# Altium PCB nahhui idioot.PcbDoc
Units mil, origin at the board's own origin, x right, y up, seen from the top; angles counter-clockwise.
Board outline 3395 x 2505 mil, 4 copper layers (Top Layer, GND top, GND bottom, Bottom Layer), stack 23.756 mil thick; 99 components, 80 nets, 373 pads, 151 vias.
Unrouted connection lines stored in the file: 3.
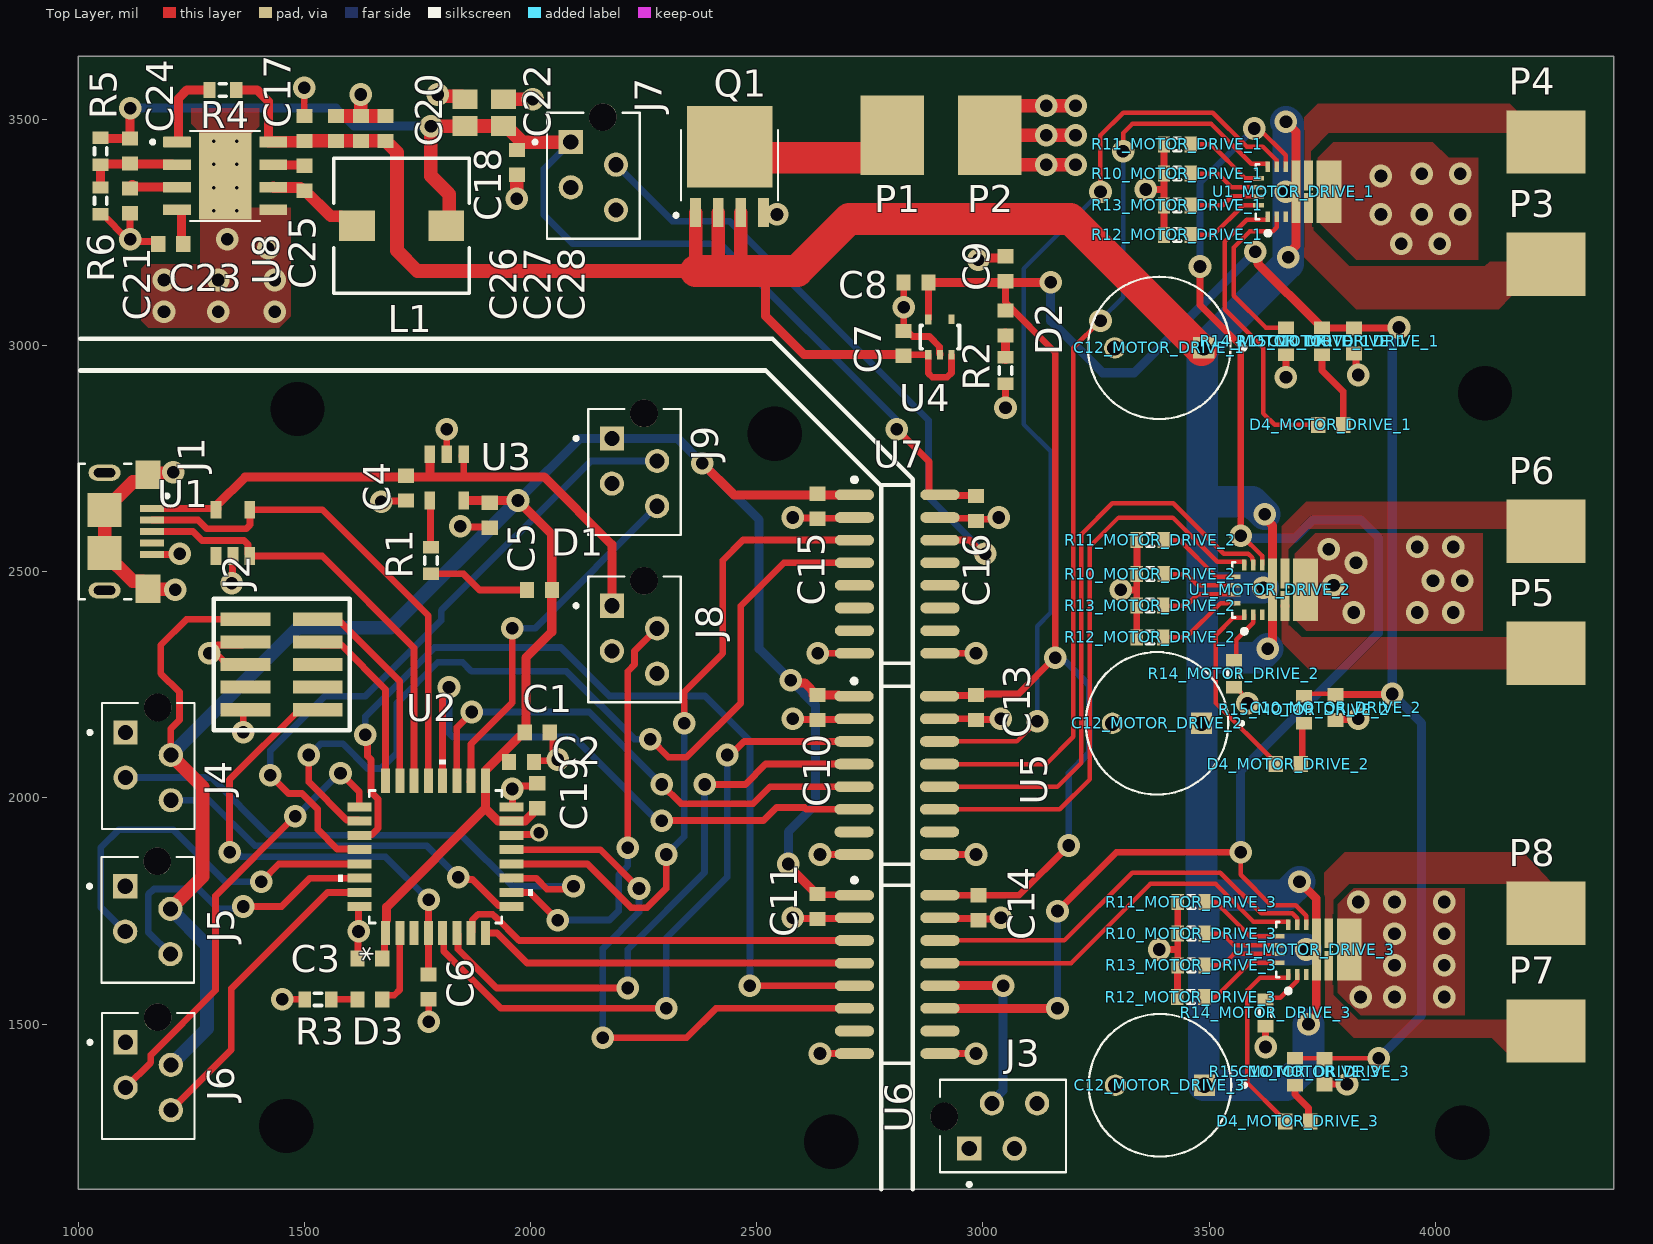
[diagram p0: Top Layer view]
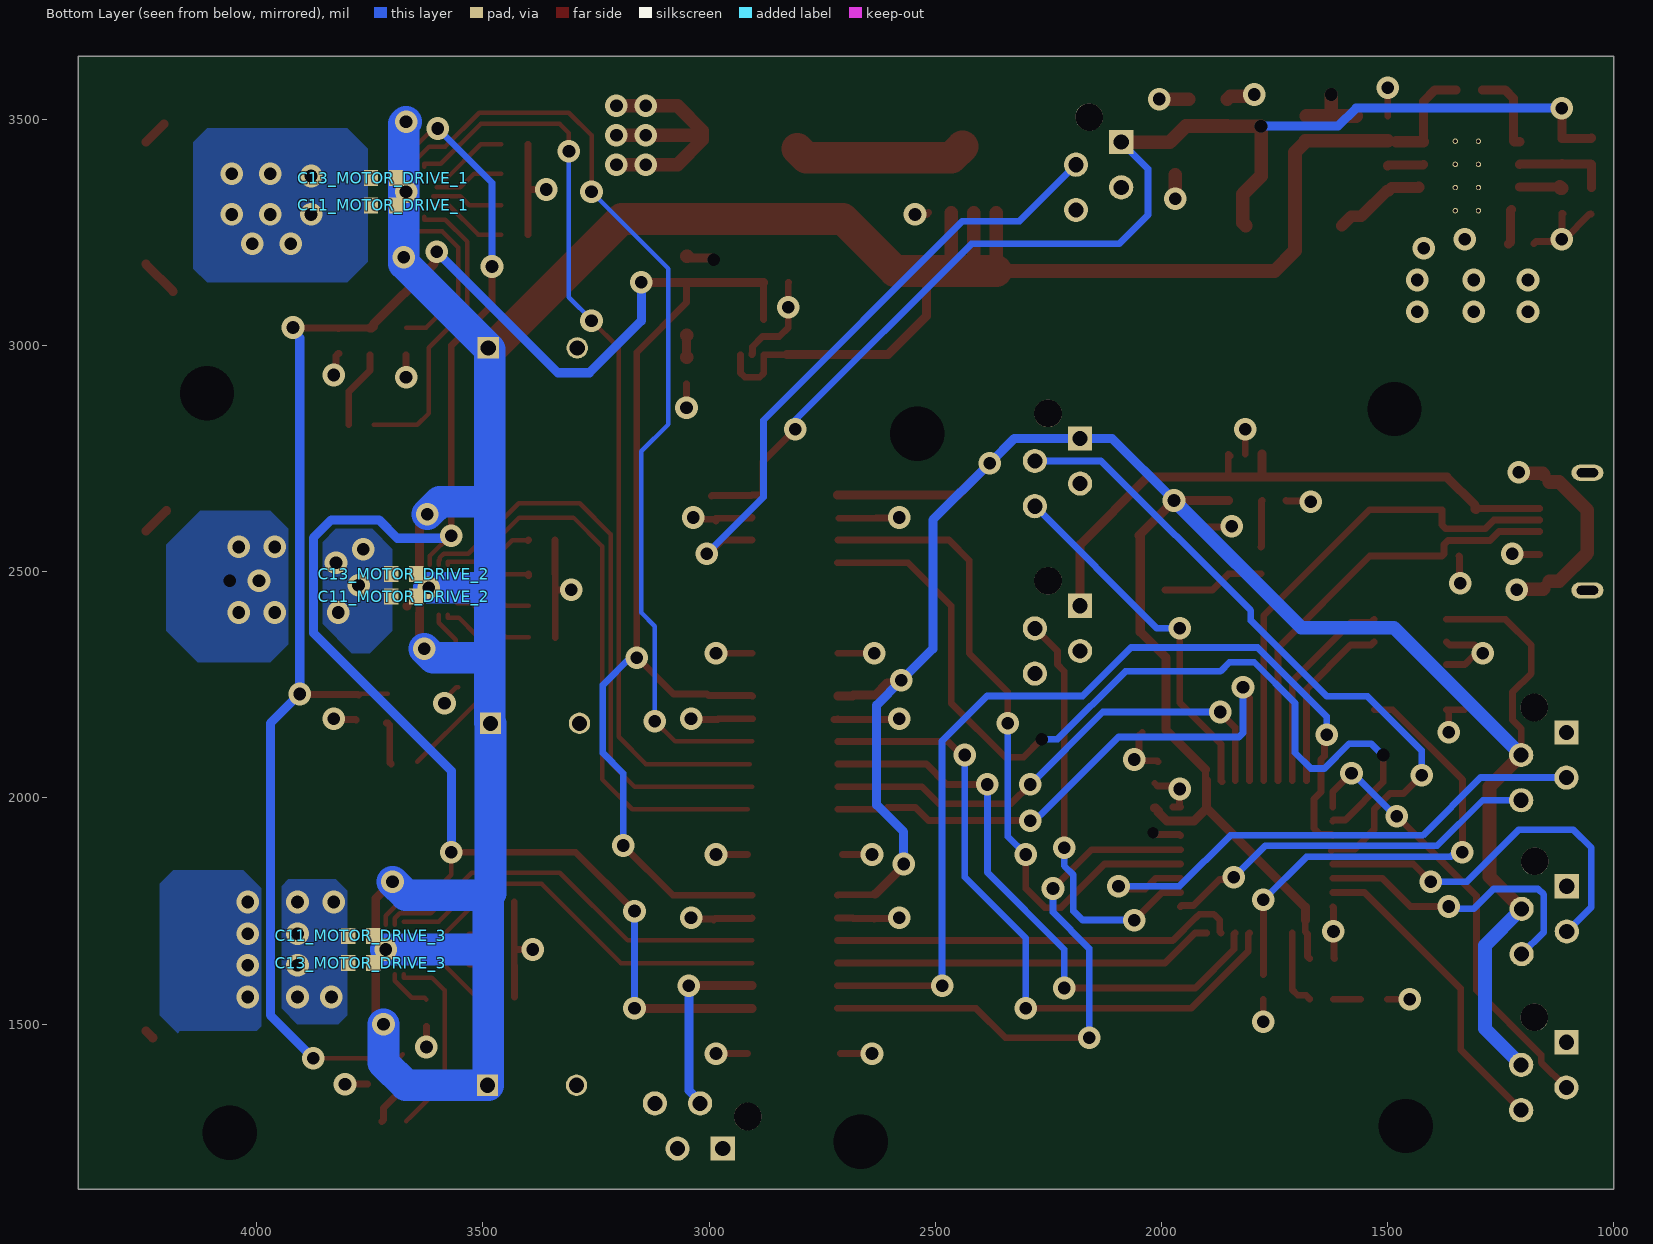
[diagram p1: Bottom Layer view, seen from below]
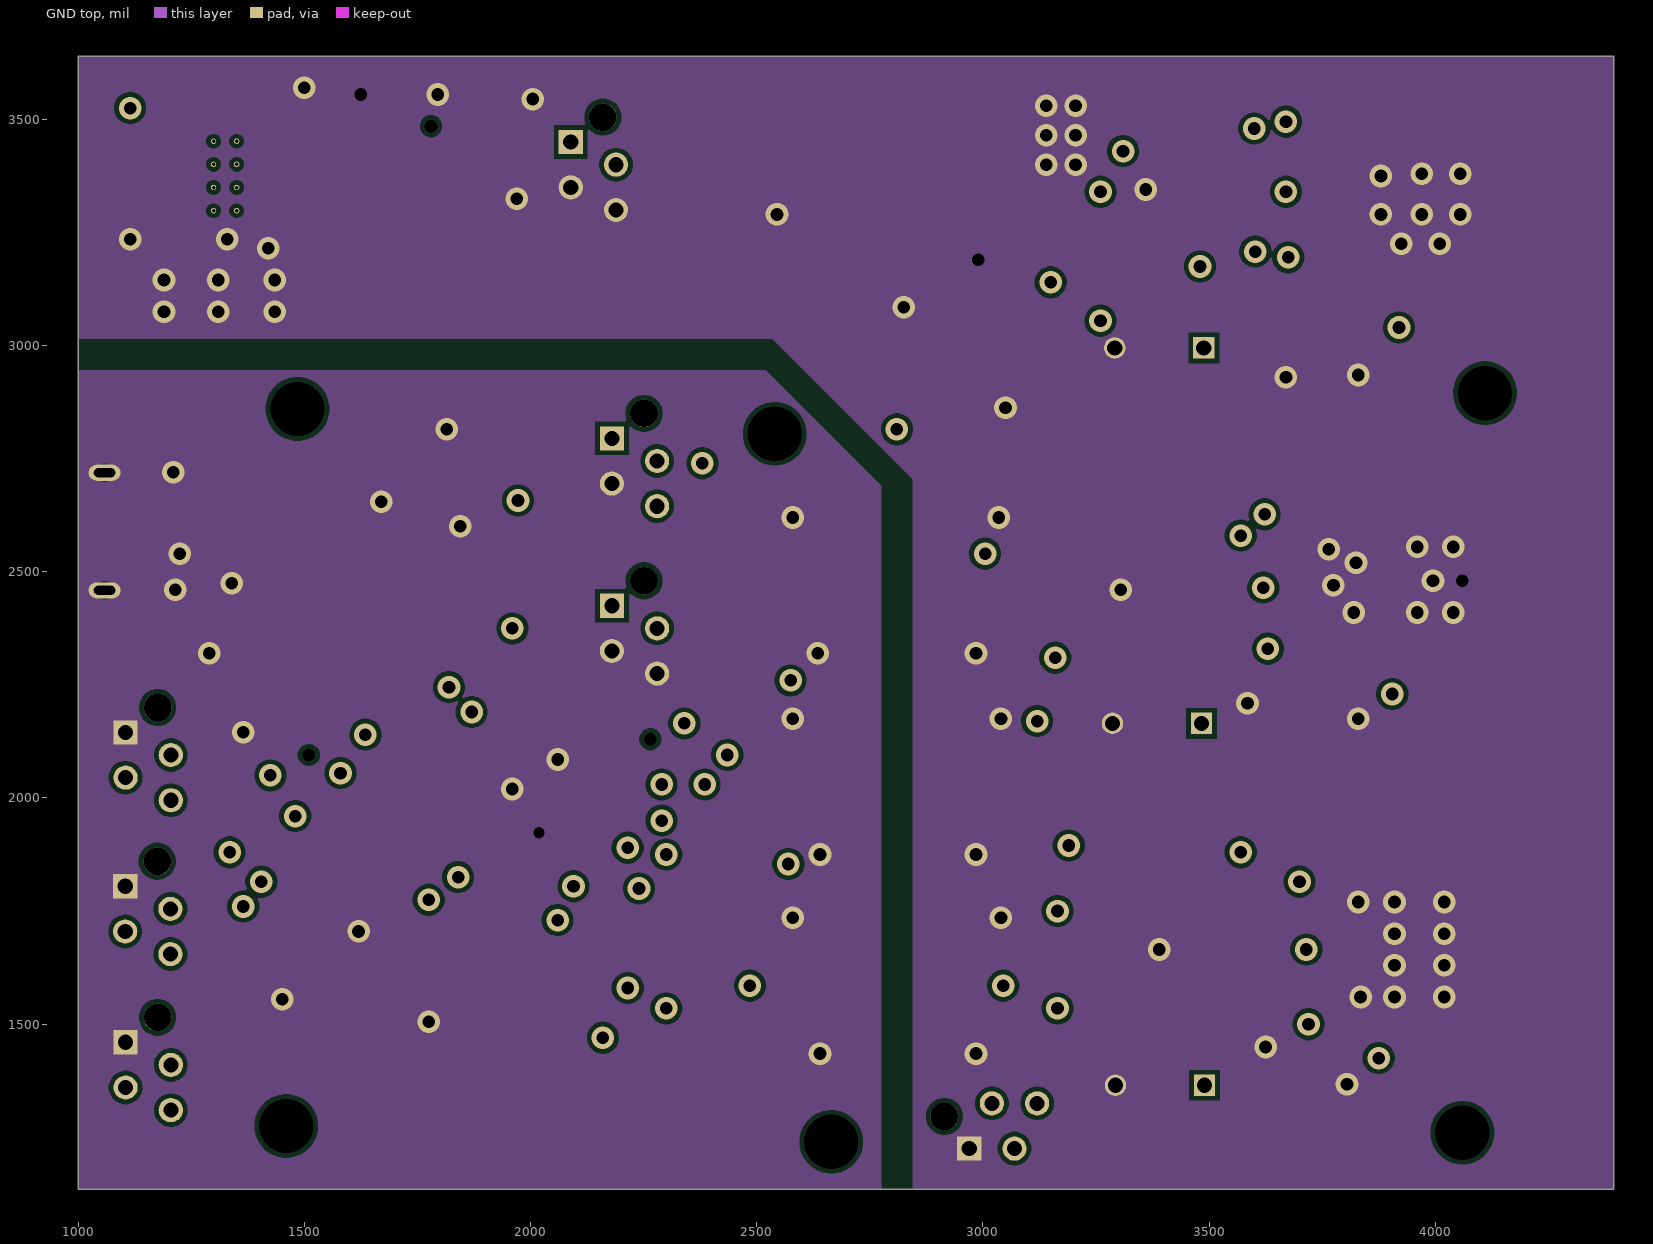
[diagram p2: GND top]
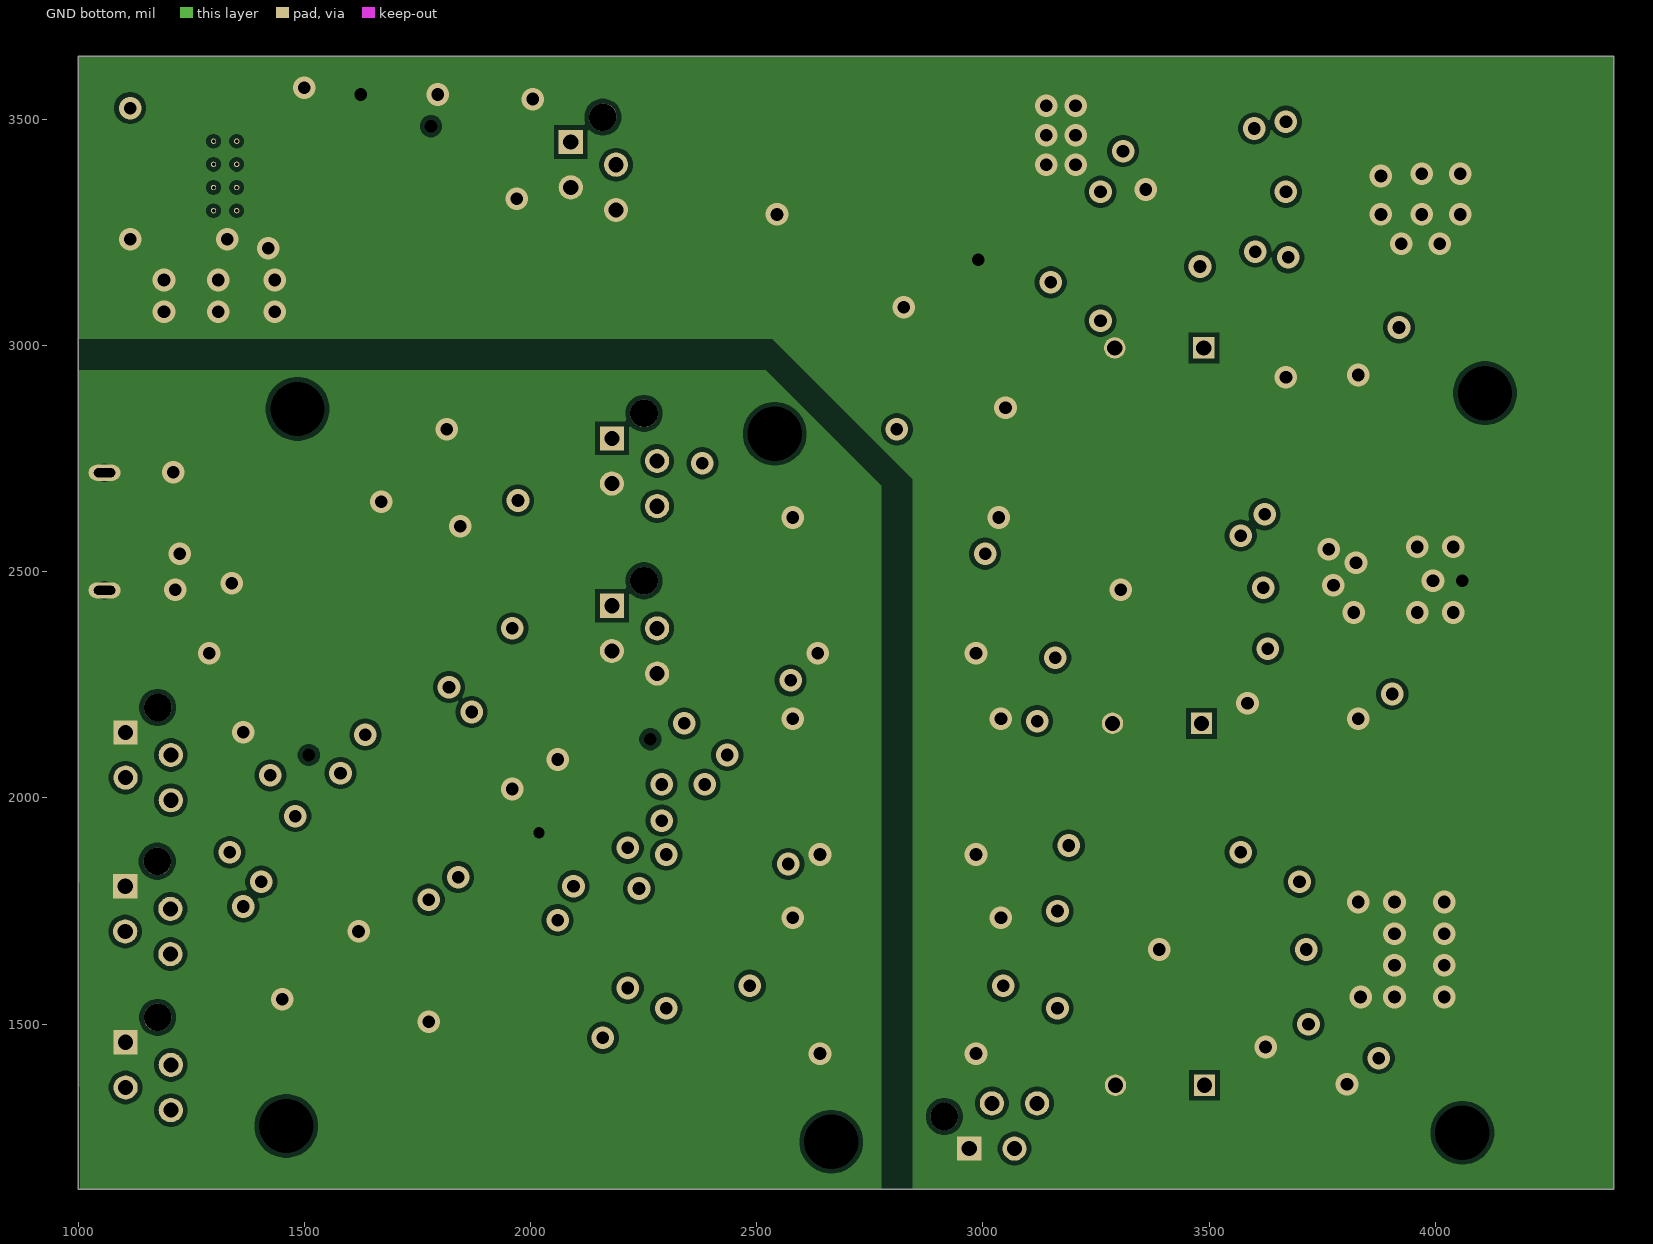
[diagram p3: GND bottom]

## Layer stack, top to bottom
Top Solder: solder mask 0.4, Solder Resist, Dk 3.5
Top Layer: signal copper 1.378
Dielectric 2: prepreg 2.8, PP-006, Dk 4.1
GND top: signal copper 1.4
Dielectric 1: dielectric 12.6, FR-4, Dk 4.8
GND bottom: signal copper 1.4
Dielectric 3: prepreg 2.8, PP-006, Dk 4.1
Bottom Layer: signal copper 1.378
Bottom Solder: solder mask 0.4, Solder Resist, Dk 3.5

## Board outline
1000,1135 1000,3640 4395,3640 4395,1135

## Design rules (kind name [scope] priority, off if disabled: settings)
Clearance [All] p1: gap=10 ignorepadtopadclearanceinfootprint=TRUE except(0: Arc-Hole Track-Hole SMDPad-Hole THPad-Hole Via-Hole Fill-Hole Poly-Hole Region-Hole Text-Hole; 7: Arc-SMDPad Track-SMDPad; 8: Arc-Arc Arc-Track Track-Track)
PolygonConnect [All] p1: connectstyle=Direct reliefconductorwidth=10 reliefentries=4 polygonreliefangle="90 Angle" airgapwidth=10
RoutingVias [All] p1: holewidth=28 width=50 viastyle="Through Hole" minholewidth=28 minwidth=50 maxholewidth=28 maxwidth=50
SolderMaskExpansion SolderMaskExpansionVia [IsVia] p1: expansion=4 istentingtop=TRUE
SolderMaskExpansion [All] p2: expansion=4 istentingtop=FALSE
Width [All] p1: maxlimit=70 minlimit=10 preferedwidth=15 midlayer1_maxwidth=10 midlayer1_prefwidth=10 midlayer2_maxwidth=10 midlayer2_prefwidth=10 minimp=50.000000 maximp=50.000000 favimp=50.000000
30 further rules are at their usual default settings.

## Classes and differential pairs
channel class motor_DRV: MOTOR_DRIVE_1 MOTOR_DRIVE_2 MOTOR_DRIVE_3
component class motor_MCU: C1 C2 C3 C4 C5 C6 C7 C8 C9 C10 C11 C13 C14 C15 C16 C17 C19 C20 C21 C23 C24 C25 C26 C27 C28 D1 D2 D3 J1 J2 J3 J4 J5 J6 J7 J8 J9 L1 P1 P2 P3 P4 P5 P6 P7 P8 Q1 R1 R2 R3 R4 R5 R6 U1 U2 U3 U4 U5 U6 U7 U8
component class MOTOR_DRIVE_3: C10_MOTOR_DRIVE_3 C11_MOTOR_DRIVE_3 C12_MOTOR_DRIVE_3 C13_MOTOR_DRIVE_3 D4_MOTOR_DRIVE_3 R10_MOTOR_DRIVE_3 R11_MOTOR_DRIVE_3 R12_MOTOR_DRIVE_3 R13_MOTOR_DRIVE_3 R14_MOTOR_DRIVE_3 R15_MOTOR_DRIVE_3 U1_MOTOR_DRIVE_3
component class MOTOR_DRIVE_2: C10_MOTOR_DRIVE_2 C11_MOTOR_DRIVE_2 C12_MOTOR_DRIVE_2 C13_MOTOR_DRIVE_2 D4_MOTOR_DRIVE_2 R10_MOTOR_DRIVE_2 R11_MOTOR_DRIVE_2 R12_MOTOR_DRIVE_2 R13_MOTOR_DRIVE_2 R14_MOTOR_DRIVE_2 R15_MOTOR_DRIVE_2 U1_MOTOR_DRIVE_2
component class MOTOR_DRIVE_1: C10_MOTOR_DRIVE_1 C11_MOTOR_DRIVE_1 C12_MOTOR_DRIVE_1 C13_MOTOR_DRIVE_1 D4_MOTOR_DRIVE_1 R10_MOTOR_DRIVE_1 R11_MOTOR_DRIVE_1 R12_MOTOR_DRIVE_1 R13_MOTOR_DRIVE_1 R14_MOTOR_DRIVE_1 R15_MOTOR_DRIVE_1 U1_MOTOR_DRIVE_1

## Components (designator, comment, footprint, x,y, rotation, side; value= is the part's Value field where it differs from the comment)
C1 "Cap Semi" 1608[0603] 2015,2145 r180 top value=4.7uF
C2 "Cap Semi" 1608[0603] 1980,2080 r180 top value=100nF
C3 "Cap Semi" 1608[0603] 1645,1645 r0 top value=100nF
C4 "Cap Semi" 1608[0603] 1725,2685 r90 top value=4.7uF
C5 "Cap Semi" 1608[0603] 1910,2625 r90 top value=4.7uF
C6 "Cap Semi" 1608[0603] 1775,1582.44 r90 top value=100nF
C7 "Cap Semi" 1608[0603] 2825,3005 r270 top value=4.7uF
C8 "Cap Semi" 1608[0603] 2852.44,3140 r0 top value=4.7uF
C9 "Cap Semi" 1608[0603] 3050,3170 r270 top value=100nF
C10 "Cap Semi" 1608[0603] 2635,2200 r90 top value=100nF
C10_MOTOR_DRIVE_1 "Cap Semi" 1608[0603] 3820,3010 r90 top value=100nF (schematic designator C10)
C10_MOTOR_DRIVE_2 "Cap Semi" 1608[0603] 3780,2200 r90 top value=100nF (schematic designator C10)
C10_MOTOR_DRIVE_3 "Cap Semi" 1608[0603] 3755,1395 r90 top value=100nF (schematic designator C10)
C11 "Cap Semi" 1608[0603] 2635,1760 r90 top value=100nF
C11_MOTOR_DRIVE_1 "Cap Semi" 1608[0603] 3720,3310 r180 bottom value=4.7uf (schematic designator C11)
C11_MOTOR_DRIVE_2 "Cap Semi" 1608[0603] 3675,2445 r180 bottom value=4.7uf (schematic designator C11)
C11_MOTOR_DRIVE_3 "Cap Semi" 1608[0603] 3770,1695 r180 bottom value=4.7uf (schematic designator C11)
C12_MOTOR_DRIVE_1 "470u" CAPPRD500W60D800H1500 3390,2995 r180 top (schematic designator C12)
C12_MOTOR_DRIVE_2 "470u" CAPPRD500W60D800H1500 3385,2165 r180 top (schematic designator C12)
C12_MOTOR_DRIVE_3 "470u" CAPPRD500W60D800H1500 3391.57,1365 r180 top (schematic designator C12)
C13 "Cap Semi" 1608[0603] 2985,2200 r90 top value=100nF
C13_MOTOR_DRIVE_1 "Cap Semi" 1608[0603] 3720,3370 r180 bottom value=100nF (schematic designator C13)
C13_MOTOR_DRIVE_2 "Cap Semi" 1608[0603] 3675,2495 r180 bottom value=100nF (schematic designator C13)
C13_MOTOR_DRIVE_3 "Cap Semi" 1608[0603] 3770,1635 r180 bottom value=100nF (schematic designator C13)
C14 "Cap Semi" 1608[0603] 2990,1757.44 r90 top value=100nF
C15 "Cap Semi" 1608[0603] 2635,2645 r90 top value=100nF
C16 "Cap Semi" 1608[0603] 2985,2640 r90 top value=100nF
C17 "Cap Semi" 1608[0603] 1500,3480 r270 top value=4.7uF
C18 "Cap Semi" 1608[0603] 1970,3405 r90 top value=4.7uF
C19 "Cap Semi" 1608[0603] 2015,2005 r270 top value=100nF
C20 "Cap Pol3" C0805 1855,3515 r90 top value=22uF
C21 "Cap Semi" 1608[0603] 1115,3320 r90 top value=1uF
C22 "Cap Pol3" C0805 1940,3515 r90 top value=22uF
C23 "Cap Semi" 1608[0603] 1205,3225 r180 top value=3.3nF
C24 "Cap Semi" 1608[0603] 1115,3430 r90 top value=12pF
C25 "Cap Semi" 1608[0603] 1500,3370 r90 top value=100nF
C26 "Cap Semi" 1608[0603] 1570,3480 r270 top value=4.7uF
C27 "Cap Semi" 1608[0603] 1625,3480 r270 top value=4.7uF
C28 "Cap Semi" 1608[0603] 1680,3480 r270 top value=4.7uF
D1 "3V3_GOOD" 1608[0603] 2020,2460 r180 top
D2 "M5V_GOOD" 1608[0603] 3050,3050 r270 top
D3 "LED" 1608[0603] 1645,1555 r180 top
D4_MOTOR_DRIVE_1 "LED2" 1608[0603] 3768.9,2825 r180 top (schematic designator D4)
D4_MOTOR_DRIVE_2 "LED2" 1608[0603] 3675,2075 r180 top (schematic designator D4)
D4_MOTOR_DRIVE_3 "LED2" 1608[0603] 3696.1,1285 r180 top (schematic designator D4)
J1 "10118193-0001LF" FCI_10118193-0001LF 1058.54,2589.02 r270 top
J2 "FTSH-105-01-XXX-DV-K" FTSH-105-01-XXX-DV-K 1450,2295 r270 top
J3 "7-215079-4" TE_7-215079-4 2970,1225 r180 top
J4 "7-215079-4" TE_7-215079-4 1105,2145 r90 top
J5 "7-215079-4" TE_7-215079-4 1104.13,1804.88 r90 top
J6 "7-215079-4" TE_7-215079-4 1105,1460 r90 top
J7 "7-215079-4" TE_7-215079-4 2089.13,3449.88 r90 top
J8 "7-215079-4" TE_7-215079-4 2180,2425 r90 top
J9 "7-215079-4" TE_7-215079-4 2180,2795 r90 top
L1 "Inductor" WE-PD-M-PB 1715,3265 r0 top value=4.7uH
P1 "BAT+" PCBComponent_1 2800,3465 r90 top
P2 "BAT-" PCBComponent_1 3015,3465 r90 top
P3 "M1+" PCBComponent_1 4245,3180 r180 top
P4 "M1-" PCBComponent_1 4245,3450 r180 top
P5 "M2+" PCBComponent_1 4245,2320 r180 top
P6 "M2-" PCBComponent_1 4245,2590 r180 top
P7 "M3+" PCBComponent_1 4245,1485 r180 top
P8 "M3-" PCBComponent_1 4245,1745 r180 top
Q1 "BUK6Y10-30P" TO127P600X120-5N 2440,3398.27 r0 top
R1 "Res2" J1-0603 1780,2525 r270 top value=1K
R2 "Res2" J1-0603 3050,2945 r90 top value=13K
R3 "Res2" J1-0603 1530.47,1555 r0 top value=1K
R4 "Res2" J1-0603 1320,3565 r0 top value=10K
R5 "Res2" J1-0603 1050,3429.53 r270 top value=133K
R6 "Res2" J1-0603 1050,3320 r270 top value=24K
R10_MOTOR_DRIVE_1 "Rsr" J1-0603 3430,3380 r180 top value=0 (schematic designator R10)
R10_MOTOR_DRIVE_2 "Rsr" J1-0603 3370,2495 r180 top value=0 (schematic designator R10)
R10_MOTOR_DRIVE_3 "Rsr" J1-0603 3460.47,1700 r180 top value=0 (schematic designator R10)
R11_MOTOR_DRIVE_1 "Rdiag" J1-0603 3430,3445 r180 top value=0 (schematic designator R11)
R11_MOTOR_DRIVE_2 "Rdiag" J1-0603 3370,2570 r180 top value=0 (schematic designator R11)
R11_MOTOR_DRIVE_3 "Rdiag" J1-0603 3460.47,1770 r180 top value=0 (schematic designator R11)
R12_MOTOR_DRIVE_1 "Rmode" J1-0603 3430,3245 r180 top value=0 (schematic designator R12)
R12_MOTOR_DRIVE_2 "Rmode" J1-0603 3369.53,2355 r180 top value=0 (schematic designator R12)
R12_MOTOR_DRIVE_3 "Rmode" J1-0603 3459.53,1560 r180 top value=0 (schematic designator R12)
R13_MOTOR_DRIVE_1 "Rtrip" J1-0603 3430,3310 r180 top value=0 (schematic designator R13)
R13_MOTOR_DRIVE_2 "Rtrip" J1-0603 3369.53,2425 r180 top value=0 (schematic designator R13)
R13_MOTOR_DRIVE_3 "Rtrip" J1-0603 3460.47,1630 r180 top value=0 (schematic designator R13)
R14_MOTOR_DRIVE_1 "R|PROP|" J1-0603 3670,3009.53 r270 top value=2K2 (schematic designator R14)
R14_MOTOR_DRIVE_2 "R|PROP|" J1-0603 3555,2274.53 r270 top value=2K2 (schematic designator R14)
R14_MOTOR_DRIVE_3 "R|PROP|" J1-0603 3625,1525 r270 top value=2K2 (schematic designator R14)
R15_MOTOR_DRIVE_1 "Rled" J1-0603 3750,3009.53 r90 top value=4K7 (schematic designator R15)
R15_MOTOR_DRIVE_2 "Rled" J1-0603 3710,2195 r90 top value=4K7 (schematic designator R15)
R15_MOTOR_DRIVE_3 "Rled" J1-0603 3690,1395 r90 top value=4K7 (schematic designator R15)
U1 "CM1223" SOT23-5 1342.4,2535 r0 top
U1_MOTOR_DRIVE_1 "PDRV8243HRXYQ1" RXY0014A-MFG 3694.13,3340 r90 top (schematic designator U1)
U1_MOTOR_DRIVE_2 "PDRV8243HRXYQ1" RXY0014A-MFG 3641.97,2460 r90 top (schematic designator U1)
U1_MOTOR_DRIVE_3 "PDRV8243HRXYQ1" RXY0014A-MFG 3739.13,1665 r90 top (schematic designator U1)
U2 "STM32G441KBT3" LQFP32_7X7_STM 1790,1870 r90 top
U3 "NCP164C" SOT23-5 1815,2760 r180 top
U4 "NCV8730" TSSOP5 2905,3020.94 r0 top
U5 "MAX14930" SOIC16_N 2810,2050 r0 top
U6 "MAX14930" SOIC16_N 2810.51,1610 r0 top
U7 "MAX14930" SOIC16_N 2810.51,2495 r0 top
U8 "TPS54227DDA" VREG_LM5017MR/NOPB 1325,3375 r0 top

## Footprints (in the part's own frame and the unit in brackets; to place one, negate y for a bottom-side part, rotate by r counter-clockwise, add the part's x,y. Pads: shape width x height; smd on the part's side, far side on the other; paste and mask are expansions set on the pad)
1608[0603] [mm] "Chip Capacitor, Body 1.6x0.8mm, IPC High Density"
  rect 0.8x0.9 smd: 1(-0.7,0) 2(0.7,0)
  body extent -0.87,-0.48 0.87,0.48, height 1.3
C0805 [mm] "Chip Capacitor, Body 2.0x1.3mm, IPC High Density"
  rect 1.1x1.4 smd: 1(-0.75,0) 2(0.75,0)
  body extent -1.1,-0.72 1.1,0.72, height 1.4
CAPPRD500W60D800H1500 [mm]
  round 1.2 hole 0.85: N(2.5,0)
  rect 1.2x1.2 hole 0.85: P(-2.5,0)
  silkscreen extent -4.85,-4 4,4, body extent -4,-4 4,4, height 15
FCI_10118193-0001LF [mm]
  rect 0.4x1.35 smd: 1(-1.3,2.675) 2(-0.65,2.675) 3(0,2.675) 4(0.65,2.675) 5(1.3,2.675)
  rect 1.6x1.4 smd: S1(-3.2,2.45) S2(3.2,2.45)
  rect 1.9x1.9 smd: S3(1.2,0) S4(-1.2,0)
  oval 0.9x1.8 hole 0.5 slot 1.2 at 90 deg: S5(-3.3,0) S6(3.3,0)
  round 0.5 hole 0.5 unplated: ""(-3.3,0) ""(3.3,0)
  silkscreen extent -3.8,-1.45 3.8,3.6
FTSH-105-01-XXX-DV-K [mil]
  rect 29x110 smd mask+2: 1(-100,-80) 2(-100,80) 3(-50,-80) 4(-50,80) 5(0,-80) 6(0,80) 7(50,-80) 8(50,80) 9(100,-80) 10(100,80)
  silkscreen extent -145,-150 145,150
J1-0603 [mm] "Chip Resistor, Body 1.6x0.8mm, IPC High Density"
  rect 0.7x0.9 smd: 1(-0.75,0) 2(0.75,0)
  silkscreen extent -0.2,-0.35 0.2,0.35, body extent -0.85,-0.48 0.85,0.48, height 0.9
LQFP32_7X7_STM [mil]
  rect 53.5x19.72 smd paste+0 mask+0: 1(-168.25,110.24) 2(-168.25,78.74) 3(-168.25,47.24) 4(-168.25,15.75) 5(-168.25,-15.75) 6(-168.25,-47.24) 7(-168.25,-78.74) 8(-168.25,-110.24) 17(168.25,-110.24) 18(168.25,-78.74) 19(168.25,-47.24) 20(168.25,-15.75) 21(168.25,15.75) 22(168.25,47.24) 23(168.25,78.74) 24(168.25,110.24)
  rect 19.72x53.5 smd paste+0 mask+0: 9(-110.24,-168.25) 10(-78.74,-168.25) 11(-47.24,-168.25) 12(-15.75,-168.25) 13(15.75,-168.25) 14(47.24,-168.25) 15(78.74,-168.25) 16(110.24,-168.25) 25(110.24,168.25) 26(78.74,168.25) 27(47.24,168.25) 28(15.75,168.25) 29(-15.75,168.25) 30(-47.24,168.25) 31(-78.74,168.25) 32(-110.24,168.25)
  silkscreen extent -146,-215 215,215, body extent 0,0 10,10, height 10
PCBComponent_1 [mil]
  rect 175x140 smd: 1(0,0)
RXY0014A-MFG [mm]
  rect 0.6x0.25 smd paste+0 mask-0.292: 1(-1.4,1.625) 2(-1.4,1.125) 3(-1.4,0.625) 8(1.4,0.625) 9(1.4,1.125) 10(1.4,1.625)
  rect 3.5x0.5 smd paste-1.737 mask-1.74: 4(0,0.05)
  rect 1.675x0.5 smd paste-0.825 mask-0.826: 5(-0.913,-0.65) 7(0.913,-0.65)
  rect 3.5x1.4 smd paste-1.737 mask-1.74: 6(0,-1.8)
  rect 0.25x0.6 smd paste+0 mask-0.292: 11(0.75,2.15) 12(0.25,2.15) 13(-0.25,2.15) 14(-0.75,2.15)
  silkscreen extent -2.45,1.5 1.55,2.3, body extent 0,0 0.25,0.25, height 0.25
SOIC16_N [mm] "SOIC, 16-Leads, Body 9.9x3.9mm, Pitch 1.27mm, IPC Medium Density"
  oval 2.2x0.6 smd: 1(-2.4,4.445) 2(-2.4,3.175) 3(-2.4,1.905) 4(-2.4,0.635) 5(-2.4,-0.635) 6(-2.4,-1.905) 7(-2.4,-3.175) 8(-2.4,-4.445) 9(2.4,-4.445) 10(2.4,-3.175) 11(2.4,-1.905) 12(2.4,-0.635) 13(2.4,0.635) 14(2.4,1.905) 15(2.4,3.175) 16(2.4,4.445)
  silkscreen extent -2.52,-5 0.9,5.42, body extent -2,-5 2,5, height 1.91
SOT23-5 [mm] "SOT143-4 as used in SP0503BAHTG"
  round 0.4 on Top Overlay: 1(-1.7,0)
  rect 0.6x1 smd: 1(-0.95,0) 2(0,0) 3(0.95,0) 4(0.95,2.6) 5(-0.95,2.6)
  body extent -1.46,0.13 1.46,2.47, height 1
TE_7-215079-4 [mm]
  rect 1.358x1.358 hole 0.85: 1(0,0)
  round 1.358 hole 0.85: 2(-1.27,-2.54) 3(-2.54,0) 4(-3.81,-2.54)
  round 1.55 hole 1.55 unplated: ""(1.4,-1.8)
  silkscreen extent -5.43,-3.87 1.65,2.11
TO127P600X120-5N [mm]
  rect 0.6x1.62 smd: 1(-1.905,-2.65) 2(-0.635,-2.65) 3(0.635,-2.65) 4(1.905,-2.65)
  rect 4.8x4.58 smd paste-3: 5(0,1.06)
  silkscreen extent -3.1,-2.9 2.72,1.97
TSSOP5 [mm]
  rect 0.35x0.55 smd: 1(-0.65,-1.04) 2(0,-1.04) 3(0.65,-1.04) 4(0.65,0.95) 5(-0.65,0.94)
  silkscreen extent -1.1,-0.7 1.1,0.6
VREG_LM5017MR/NOPB [mm]
  rrect5% 1.55x0.6 smd mask+0: 1(-2.7,1.905) 2(-2.7,0.635) 3(-2.7,-0.635) 4(-2.7,-1.905) 5(2.7,-1.905) 6(2.7,-0.635) 7(2.7,0.635) 8(2.7,1.905)
  rect 2.95x4.9 smd paste-3 mask+0: 9(0,0)
  round 0.3 hole 0.2: 10(-0.65,1.95) 11(0.65,1.95) 12(-0.65,0.65) 13(0.65,0.65) 14(-0.65,-0.65) 15(0.65,-0.65) 16(-0.65,-1.95) 17(0.65,-1.95)
  silkscreen extent -4.17,-2.52 1.95,2.52
WE-PD-M-PB [mm] "SMD Inductor, 2-Leads, Body 7.3 x 7.3 mm"
  rect 2x1.7 smd: 1(-2.5,0) 2(2.5,0)
  silkscreen extent -3.8,-3.8 3.8,3.8, body extent -3.65,-3.65 3.65,3.65, height 4.09

## Part data
C1 C2 C3 C4 C5 C6 C7 C8 C9 C10 C10_MOTOR_DRIVE_1 C10_MOTOR_DRIVE_2 C10_MOTOR_DRIVE_3 C11 C11_MOTOR_DRIVE_1 C11_MOTOR_DRIVE_2 C11_MOTOR_DRIVE_3 C13 C13_MOTOR_DRIVE_1 C13_MOTOR_DRIVE_2 C13_MOTOR_DRIVE_3 C14 C15 C16 C17 C18 C19 C21 C23 C24 C25 C26 C27 C28: "Capacitor (Semiconductor SIM Model)", LatestRevisionDate=29-May-2009, LatestRevisionNote="IPC-7351 Footprint Added.", PackageDescription="Chip Capacitor", PackageReference=C1206, Published=8-Jun-2000, Publisher="Altium Limited"
C12_MOTOR_DRIVE_1 C12_MOTOR_DRIVE_2 C12_MOTOR_DRIVE_3: library part EEUFR1E471YB, "470F 25V Aluminum Electrolytic Capacitors Radial, Can 8000 Hrs @ 105C", Package="RADIAL-2 Panasonic", Availability="In Stock", Check_prices=https://www.snapeda.com/parts/EEUFR1E471YB/Panasonic/view-part/5797024/?ref=eda, MF=Panasonic, MP=EEUFR1E471YB, Price=None, SnapEDA_Link=https://www.snapeda.com/parts/EEUFR1E471YB/Panasonic/view-part/5797024/?ref=snap
C20 C22: "Polarized Capacitor (Surface Mount)", LatestRevisionDate=29-May-2009, LatestRevisionNote="IPC-7351 Footprint Added.", PackageDescription="Chip Capacitor", PackageReference=C0805, Published=8-Jun-2000, Publisher="Altium Limited"
D1 D2 D3: library part LED2, "Typical RED, GREEN, YELLOW, AMBER GaAs LED", LatestRevisionDate=17-Jul-2002, LatestRevisionNote="Re-released for DXP Platform.", PackageDescription="SM LED; 2 Flat Leads", PackageReference=3.2X1.6X1.1, PackageVersion=Feb-2002, Published=8-Jun-2000, Publisher="Altium Limited"
D4_MOTOR_DRIVE_1 D4_MOTOR_DRIVE_2 D4_MOTOR_DRIVE_3: "Typical RED, GREEN, YELLOW, AMBER GaAs LED", LatestRevisionDate=17-Jul-2002, LatestRevisionNote="Re-released for DXP Platform.", PackageDescription="SM LED; 2 Flat Leads", PackageReference=3.2X1.6X1.1, PackageVersion=Feb-2002, Published=8-Jun-2000, Publisher="Altium Limited"
J1: "USB - micro B USB 2.0 Receptacle Connector 5 Position Surface Mount, Right Angle; Through Hole", Package=None, Availability=Unavailable, MF="Amphenol ICC", MP=10118193-0001LF, Price=None, SnapEDA_Link=https://www.snapeda.com/parts/10118193-0001LF/Amphenol%20FCI/view-part/2758989/?ref=snap
J2: "TERMINAL STRIP, .050\"(1.27mm) PITCH, 10 PINS, KEYED", MANUFACTURER=SAMTEC, CREATED="November 30, 2016 - Wendy Xin", PCB DECAL=FTSH-105-01-XXX-DV-K
J3 J4 J5 J6 J7 J8 J9: "Micro-MaTch 4 Position 1.27 mm Pitch Vertical Female-on-Board Connector", Package=SMD-6, Availability=Unavailable, MF="TE Connectivity", MP=7-215079-4, Price=None, SnapEDA_Link=https://www.snapeda.com/parts/7-215079-4/TE%20Connectivity%20AMP%20Connectors/view-part/453401/?ref=snap
P1 P2 P3 P4 P5 P6 P7 P8: library part Component_1
Q1: library part MOSFET-P, "P-Channel MOSFET", LatestRevisionDate=17-Jul-2002, LatestRevisionNote="Re-released for DXP Platform.", PackageDescription="TO, Flat Index; 3 In-Line, Axial Leads; Body Dia. 4.6mm; Lead Dia. 0.5 mm (max)", PackageReference=E3, PackageVersion=1995/1996, Published=8-Jun-2000, Publisher="Altium Limited"
R1 R2 R3 R4 R5 R6: "Resistor", LatestRevisionDate=17-Jul-2002, LatestRevisionNote="Re-released for DXP Platform.", PackageDescription="Axial Device, Thru-Hole; 2 Leads; 0.4 in Pin Spacing", PackageReference=AXIAL-0.4, Published=8-Jun-2000, Publisher="Altium Limited"
R10_MOTOR_DRIVE_1 R10_MOTOR_DRIVE_2 R10_MOTOR_DRIVE_3 R11_MOTOR_DRIVE_1 R11_MOTOR_DRIVE_2 R11_MOTOR_DRIVE_3 R12_MOTOR_DRIVE_1 R12_MOTOR_DRIVE_2 R12_MOTOR_DRIVE_3 R13_MOTOR_DRIVE_1 R13_MOTOR_DRIVE_2 R13_MOTOR_DRIVE_3 R14_MOTOR_DRIVE_1 R14_MOTOR_DRIVE_2 R14_MOTOR_DRIVE_3 R15_MOTOR_DRIVE_1 R15_MOTOR_DRIVE_2 R15_MOTOR_DRIVE_3: library part Res3, "Resistor", LatestRevisionDate=29-May-2009, LatestRevisionNote="IPC-7351 Footprint Added.", PackageDescription="Chip Resistor", PackageReference=J1-0603, Published=8-Jun-2000, Publisher="Altium Limited"
U1_MOTOR_DRIVE_1 U1_MOTOR_DRIVE_2 U1_MOTOR_DRIVE_3: "No Description Available", Mfr_Name="Texas Instruments", Copyright="Copyright (C) 2021 Ultra Librarian. All rights reserved.", Manufacturer_Part_Number=PDRV8243HRXYQ1, RefDes=RefDes, Type=DEV
U2: "No Description Available", Built_By=EMA_Cory, Copyright="Copyright (C) 2018 Accelerated Designs. All rights reserved", Datasheet=https://www.st.com/resource/en/datasheet/stm32g441kb.pdf, Manufacturer_Part_Number=STM32G441KBT3, RefDes=RefDes, SourceLibrary=Add_to_database_2020-11-05, Type=DEV, Vendor=STMicroelectronics
U4: "5V LDO"
U8: Package=None, Availability=Unavailable, MP=TPS54227DDA, Price=None
L1: Code_IEC=1005, Code_JEITA=0402, LatestRevisionDate=29-May-2009, LatestRevisionNote="IPC-7351 Footprint Added.", PackageDescription="Chip Inductor", PackageReference=0402-A, Published=8-Jun-2000, Publisher="Altium Limited"

## Free pads (board coordinates)
  round 60 hole 120: HOLE(1460,1275) HOLE(1485,2860) HOLE(2540,2805) HOLE(2665,1240) HOLE(4060,1260) HOLE(4110,2895)

## Via types
v1: diameter 50/50/50/50 (per signal layer), hole 28, Top Layer to Bottom Layer, tented both sides, 144 vias
v2: diameter 50/15/15/15 (per signal layer), hole 28, Top Layer to Bottom Layer, tented both sides, 6 vias
v3: diameter 40/15/15/15 (per signal layer), hole 25, Top Layer to Bottom Layer, tented both sides, 1 vias

## Nets (pads, with @x,y where several pads share a name; then routed paths per layer and width w, separated by ;. In a path a pad name is that pad's centre, name@x,y a point inside that pad or via, vN(x,y) a via of type N, cw(c..) or ccw(c..) an arc to the next point about the centre after c; other vN are vias at no path point)
+3V3: C1.2 C2.2 C3.2 C5.2 C10.2 C11.2 C15.2 C19.2 D1.1 J2.1 J4.2 J5.2 J6.2 J9.1 U2.1 U2.15 U2.17 U3.5 U5.1 U6.1 U7.1 | length 5960.3
  Top Layer w15: J4.2 1205,2153.27 1223.88,2172.15 1223.88,2234.19 1182.5,2275.56 1182.5,2337.6 1239.9,2395 J2.1 ; C3.2 1677.41,1649.85 1677.41,1699.39 U2.1 1682.12,1704.11 1682.12,1730.5 ; U2.17 1902.59,2040.61 U2.17@1902.59,2062.62 ; C1.2 C1.2@1987.56,2145.12 ; C1.2@1989.88,2149.91 C1.2@1989.88,2155.12 ; 2047.03,2577.03 2050,2580 ; C11.2@2633.03,1787.56 2634.31,1786.28 2714.74,1786.28 U6.1
  Top Layer w20: 1682.12,1730.5 1682.12,1758.78 1900.24,1976.89 ; U3.5 v1(1972.36,2657.64) 2050,2580 ; U2.17 1900.24,1976.89 ; U2.17@1902.59,2062.62 C1.2@1989.88,2149.91 ; C1.2@1989.88,2155.12 1989.88,2230 ; 1990,2230.12 1990,2310 2047.03,2367.03 2047.03,2577.03 ; C19.2 2013.03,1977.44 2007.28,1971.69 2007.28,1968.62 1987.55,1948.88 1958.39,1948.88 U2.15 1928.39,1948.74 1900.24,1976.89 ; v1(2380,2740) 2449.88,2670.12 2500,2670.12 2500.06,2670.06 2715.96,2670.06 U7.1 ; v1@2570,1857.44 v1(2570,1854.02) 2570,1850.59 C11.2@2633.03,1787.56 ; v1(2575,2260) 2580.74,2254.26 2606.33,2254.26 C10.2@2633.03,2227.56 ; C10.2@2625,2227.56 C10.2@2633.03,2227.56 ; U5.1 2683.04,2225 2680.48,2227.56 C10.2 C10.2@2633.03,2227.56
  Top Layer w30: J5.2 1275,1825.75 1275,2025 J4.2
  Bottom Layer w20: v1(1972.36,2657.64) 2109.72,2795 J9.1 2325,2795 v1(2380,2740) 2505.35,2614.65 2505.35,2329.65 v1(2575,2260) 2630,2205 2630,1985 2570,1925 v1(2570,1854.02)
  Bottom Layer w30: J5.2 1285,1674.02 1285,1490 J6.2 ; J4.2 1486.65,2376.65 1691.37,2376.65 v1(1972.36,2657.64)
+5_SERVO: C16.2 C18.2 C20.1 C22.1 C24.2 J7.1 L1.2 R5.1 U7.16 | length 2838.6
  Top Layer w15: v1(2810,2815) 2881,2744 2881,2673.98 2884.99,2670 U7.16 2906.22,2668.78 2993.78,2668.78 C16.2@2995,2667.56
  Top Layer w20: R5.1 1050.75,3458.31 1114.25,3458.31 C24.2 v1(1115,3525)
  Top Layer w30: L1.2 1820,3271.57 1820,3335 1780,3375 v2(1780,3485) 1780.24,3485.24 1854.76,3485.24 C20.1 C22.1 1945.91,3485.47 1981.5,3449.88 J7.1
  Bottom Layer w15: J7.1 2030,3390.75 2030,3288.79 2093.79,3225 2420,3225 2810,2835 v1(2810,2815)
  Bottom Layer w20: v1(1115,3525) 1570,3525 1610,3485 v2(1780,3485)
+5V_DR_MOTOR_DRIVE_1: C8.2 C9.2 C10_MOTOR_DRIVE_1.2 C10_MOTOR_DRIVE_2.2 C10_MOTOR_DRIVE_3.2 C13.2 C14.2 D2.1 R15_MOTOR_DRIVE_1.2 R15_MOTOR_DRIVE_2.2 R15_MOTOR_DRIVE_3.2 U4.5 U5.16 U6.16 | length 5513.2
  Top Layer w10: R15_MOTOR_DRIVE_3.2@3677.28,1433.31 3686.06,1424.53 R15_MOTOR_DRIVE_3.2 3753.03,1424.53 C10_MOTOR_DRIVE_3.2 3757.44,1425 v1(3875,1425) ; R15_MOTOR_DRIVE_2.2@3710,2230.12 3774.8,2230.12 C10_MOTOR_DRIVE_2.2@3774.92,2230
  Top Layer w15: U4.5 2879.7,3058.25 2879.7,3139.7 C8.2 ; U5.16 2906.14,2226.65 3001.65,2226.65 3005,2230 3078.81,2230 3158.81,2310 v1(3160,2310) 3160,2985 3050,3095 C9.2@3050,3140 ; U6.16 C14.2 3080,1785 v1(3190,1895) v1@3186.97,1895 ; R15_MOTOR_DRIVE_1.2 3815,3039.06 3815.28,3038.78 3918.78,3038.78 v1(3920,3040) ; C10_MOTOR_DRIVE_2.2@3774.8,2227.44 3776.14,2228.78 3903.78,2228.78 v1(3905,2230) ; C10_MOTOR_DRIVE_1.2@3818.03,3037.56 C10_MOTOR_DRIVE_1.2
  Top Layer w20: C8.2 3050,3140 v1(3150,3140) ; v1(3602.22,3207.78) 3607.96,3202.04 3607.96,3181.1 3742.28,3046.77 3742.28,3042.83 3746.06,3039.06 R15_MOTOR_DRIVE_1.2
  Bottom Layer w15: v1(3160,2310) 3175,2310 3235,2250 3235,2099.74 3190,2054.74 v1(3190,1895)
  Bottom Layer w20: v1(3150,3140) 3150,3055 3265,2940 3334.43,2940 v1(3602.22,3207.78) ; v1(3875,1425) 3970,1520 3970,2165 v1(3905,2230) 3905,3016.88 3920,3031.88 v1(3920,3040)
+5V_USB: C4.2 J1.1 J8.1 U1.5 U3.1@1852.4,2760 U3.3 | length 1357.3
  Top Layer w15: J1.1 1164.23,2639.82 1302.54,2639.82 U1.5 ; U3.1@1848.09,2755.69 1852.4,2760 1852.4,2712.4 1850,2710
  Top Layer w20: U1.5 1306.81,2639.17 1306.81,2647.05 1369.17,2709.41 1675,2709.41 1675.59,2710 1775,2710 ; U3.3 1777.6,2712.6 1775,2710 ; J8.1 2180,2560 2030,2710 1850,2710 1775,2710
DRV_OFF: U2.13 U6.6 | length 1263.4
  Top Layer w15: U2.13 2154.25,1885.75 v1(2240,1800) ; v1(2160,1470) 2345,1470 2410,1535 U6.6
  Bottom Layer w15: v1(2160,1470) 2160,1667.53 2240,1747.53 v1(2240,1800)
DRV_OFF_MOTOR_DRIVE_1: U1_MOTOR_DRIVE_1.8 U1_MOTOR_DRIVE_2.8 U1_MOTOR_DRIVE_3.8 U6.11 | length 3548.2
  Top Layer w10: v1(3570,1880) 3570,1830 3637.07,1762.93 3691.51,1762.93 3714.53,1739.91 U1_MOTOR_DRIVE_3.8 ; v1(3570,2579.93) 3572.34,2579.93 3617.28,2534.99 3617.28,2515.2 U1_MOTOR_DRIVE_2.8 ; v1(3600,3480) 3610,3480 3669.53,3420.47 U1_MOTOR_DRIVE_1.8
  Top Layer w15: v1(3165,1750) 3295,1880 v1(3570,1880) ; v1(3480,3175) 3480,3090 3570,3000 v1(3570,2579.93)
  Top Layer w20: U6.11 v1(3165,1535)
  Bottom Layer w15: v1(3165,1535) v1(3165,1750) ; v1(3480,3175) 3480,3360 v1(3600,3480)
  Bottom Layer w20: v1(3570,1880) 3570,2060 3875,2365 3875,2575 3835,2615 3729.83,2615 3689.02,2574.19 3575.74,2574.19 v1(3570,2579.93) ; v1(3600,3480) v1@3600,3488.12
GND: C1.1 C2.1 C3.1 C4.1 C5.1 C6.1 C10.1 C11.1 C15.1 C19.1 J1.5 J1.S1 J1.S2 J1.S3 J1.S4 J1.S5 J1.S6 J2.3 J2.5 J2.9 J4.1 J5.1 J6.1 J8.3 J8.4 J9.3 R3.1 U1.2 U2.14 U2.16 U2.32 U3.2 U5.2 U5.8 U6.2 U6.8 U7.2 U7.8 | length 2165.9
  Top Layer w15: J1.5 1164.23,2538.21 1223.21,2538.21 v1(1225,2540) ; J2.9@1329.5,2195 J2.9 1365,2190 v1(1365,2145) ; v1(1340,2475) 1341.2,2476.2 1341.2,2533.8 U1.2 ; J2.5 1329.5,2295 1311.2,2313.3 1296.7,2313.3 v1(1290,2320) 1308,2338 1363,2338 J2.3 ; v1(1450.94,1555.2) 1451.04,1555.1 1500.85,1555.1 R3.1 ; C3.1 1618.72,1646.28 1618.72,1703.72 v1(1620,1705) 1620,1758.01 U2.32 ; v1(1670,2655) 1671.22,2656.22 1723.78,2656.22 C4.1 ; v1(1775,1505) C6.1 ; U3.2 v1(1815,2815) ; v1(1844.51,2600.49) 1846.03,2598.97 1910.44,2598.97 C5.1@1913.25,2596.16 ; U2.14 1960.61,1919.6 2014.83,1919.6 v3(2018.67,1923.44) ; U2.16@1975.14,1980.24 U2.16 1960,1981.99 v1(1960,2020) 1966.28,2026.28 2008.72,2026.28 C19.1 ; C2.1 2010.06,2082.5 2057.5,2082.5 v1(2060,2085) 2060,2094.47 2049.69,2104.78 2049.69,2137.87 C1.1 ; v1(2580,1735) 2581.28,1733.72 2633.72,1733.72 C11.1 2636.28,1733.72 U6.2@2682.19,1733.72 ; v1(2580,2175) 2581.28,2173.72 U5.2@2724.23,2173.72 ; v1(2580,2620) 2581.28,2618.72 C15.1@2631.28,2618.72 ; C15.1@2626.65,2618.35 U7.2@2712.67,2618.35 ; v1(2635,2320) U7.8@2715,2320 ; v1(2640,1435) U6.8@2710,1435 ; v1(2640,1875) U5.8@2705,1875 ; U6.2@2682.19,1735 U6.2 ; U5.2@2714.23,2173.72 U5.2
  Top Layer w30: J1.S2@1142.44,2479.53 1120.79,2479.53 J1.S3 J1.S4 1120.79,2698.5 J1.S1@1142.44,2698.5 ; J1.S2 1156.52,2461.52 1213.48,2461.52 v1(1215,2460) ; J1.S1 1157.5,2717.5 1207.5,2717.5 v1(1210,2720)
GNDB: C7.1 C8.1 C9.1 C10_MOTOR_DRIVE_1.1 C10_MOTOR_DRIVE_2.1 C10_MOTOR_DRIVE_3.1 C11_MOTOR_DRIVE_1.1 C11_MOTOR_DRIVE_2.1 C11_MOTOR_DRIVE_3.1 C12_MOTOR_DRIVE_1.N C12_MOTOR_DRIVE_2.N C12_MOTOR_DRIVE_3.N C13.1 C13_MOTOR_DRIVE_1.1 C13_MOTOR_DRIVE_2.1 C13_MOTOR_DRIVE_3.1 C14.1 C16.1 C17.1 C18.1 C20.2 C21.1 C22.2 C23.2 C26.1 C27.1 C28.1 J3.1 J7.3 J7.4 P2.1 Q1.4 R2.1 R6.2 R10_MOTOR_DRIVE_1.2 R10_MOTOR_DRIVE_2.2 R10_MOTOR_DRIVE_3.2 R11_MOTOR_DRIVE_1.2 R11_MOTOR_DRIVE_2.2 R11_MOTOR_DRIVE_3.2 R12_MOTOR_DRIVE_1.2 R12_MOTOR_DRIVE_2.2 R12_MOTOR_DRIVE_3.2 R13_MOTOR_DRIVE_1.2 R13_MOTOR_DRIVE_2.2 R13_MOTOR_DRIVE_3.2 R14_MOTOR_DRIVE_1.2 R14_MOTOR_DRIVE_2.2 R14_MOTOR_DRIVE_3.2 U1_MOTOR_DRIVE_1.6 U1_MOTOR_DRIVE_2.6 U1_MOTOR_DRIVE_3.6 U4.2 U5.9 U5.15 U6.9 U6.15 U7.9 U7.15 U8.5 U8.9 | length 3339.5
  Top Layer w10: R14_MOTOR_DRIVE_2.2 3558.94,2245 3585,2218.94 v1(3585,2209.53)
  Top Layer w15: R6.2@1050.98,3291.46 R6.2 1053.94,3290.47 1109.41,3235 v1(1115,3235) ; C21.1@1112.05,3291.46 1113.03,3292.44 C21.1 v1(1115,3235) ; C23.2 1172.44,3230 1120,3230 v1(1115,3235) ; C17.1 v1(1500,3570) ; Q1.4 2518.94,3290 v1(2545,3290) ; C8.1 2824.94,3139.94 2824.94,3085.06 v1(2825,3085) 2825,3040 2845,3020 2881.87,3020 2904.39,2997.48 2904.39,2983.33 2905,2982.72 U4.2 ; U5.15 2904.55,2174.94 2980,2174.94 2981.22,2173.72 3038.72,2173.72 v1(3040,2175) ; U6.15 2906.65,1733.35 2986.53,1733.35 C14.1 2992.56,1732.44 3037.44,1732.44 v1(3040,1735) ; U7.9 v1(2985,2320) ; U7.15 2906.65,2618.35 C16.1@2985,2618.35 ; U6.9@2915,1435 v1(2985,1435) ; U5.9@2915,1875 v1(2985,1875) ; C16.1 2988.78,2616.22 3031.22,2616.22 v1(3035,2620) ; v1(3050,2862.6) R2.1 ; v1(3205,3400) 3211.7,3393.3 v1@3215.71,3393.3 ; v1(3205,3465) 3211.7,3458.3 v1@3211.7,3448.5 ; v1(3305,2460) 3340.24,2460 ; R12_MOTOR_DRIVE_2.2 R13_MOTOR_DRIVE_2.2 3340.24,2425.24 3340.24,2460 ; R11_MOTOR_DRIVE_2.2 R10_MOTOR_DRIVE_2.2 3340.24,2494.76 3340.24,2460 ; v1(3360,3345) 3400.47,3345 ; v1(3390,1665) 3430.94,1665 ; R12_MOTOR_DRIVE_1.2 R13_MOTOR_DRIVE_1.2 3400.47,3345 ; R11_MOTOR_DRIVE_1.2 R10_MOTOR_DRIVE_1.2 3400.47,3345 ; R12_MOTOR_DRIVE_3.2 3430.47,1560.47 3430.47,1629.53 R13_MOTOR_DRIVE_3.2 3430.94,1665 ; R11_MOTOR_DRIVE_3.2 R10_MOTOR_DRIVE_3.2 3430.94,1665 ; v1(3625,1449.53) R14_MOTOR_DRIVE_3.2 ; v1(3670,2930) R14_MOTOR_DRIVE_1.2 ; C10_MOTOR_DRIVE_3.1 3755.06,1367.5 3804.94,1367.5 v1(3805,1367.56) ; C10_MOTOR_DRIVE_2.1 3781.28,2173.72 3828.72,2173.72 v1(3830,2175) ; C10_MOTOR_DRIVE_1.1@3818.03,2982.44 C10_MOTOR_DRIVE_1.1 3825,2977.44 3825,2940 v1(3830,2935)
  Top Layer w20: v2(2990,3190) 2993.78,3193.78 3042.28,3193.78 3045.59,3197.09 C9.1@3045.59,3200
  Top Layer w30: C26.1@1578.31,3508.31 1570.75,3508.31 C26.1 C27.1 ; v2(1625,3555) C27.1 ; C28.1@1671.69,3508.31 1679.25,3508.31 C28.1 C27.1 ; v1(1795,3555) 1798.83,3551.17 1848.35,3551.17 C20.2 ; C22.2 1940.24,3544.76 2004.76,3544.76 v1(2005,3545) ; v1(1970,3325) C18.1 ; C9.1@3048.03,3197.56 C9.1 ; v1(3205,3400) v1(3140,3400) 3070,3400 3015,3455 P2.1 ; v1(3205,3465) v1(3140,3465) P2.1 ; v1(3205,3530) v1(3140,3530) 3070,3530 3015,3475 P2.1
  other v1: 3835,1560 3910,1560 4020,1560 3910,1630 4020,1630 3910,1700 4020,1700 3830,1770 3910,1770 4020,1770 3820,2410 3960,2410 4040,2410 3775,2470 3995,2480 3825,2520 3765,2550 3960,2555 4040,2555 1190,3075 1310,3075 1435,3075 1190,3145 1310,3145 1435,3145 1420,3215 3925,3225 4010,3225 1330,3235 3880,3290 3970,3290 4055,3290 3880,3375 3970,3380 4055,3380
  other v2: 4060,2480
I2C_SCL: J9.4 U2.18 | length 809.7
  Top Layer w15: U2.18@1866.38,2035.89 U2.18 1868.74,2119.49 1959.63,2210.39 1959.63,2374.63 v1(1960,2375)
  Bottom Layer w15: v1(1960,2375) 2010,2375 J9.4
I2C_SDA: J9.2 U2.28 | length 1482.1
  Top Layer w15: v1(1425,2050) 1465,2010 1495,2010 1530,1975 1530,1930 1572.5,1887.5 1620,1887.5 U2.28 U2.28@1624.11,1883.39
  Bottom Layer w15: v1(1425,2050) 1425,2105 1544.68,2224.68 1634.68,2224.68 1802.65,2392.65 1802.65,2414.04 2133.61,2745 J9.2
IR_IN: J8.2 U2.10 | length 930.6
  Top Layer w15: U2.10 1998.74,1791.26 v1(2060,1730) ; v1(2215,1890) 2215,2280 2230,2295 2230,2325 J8.2
  Bottom Layer w15: v1(2060,1730) 2175,1730 2195,1750 2195,1830 2215,1850 v1(2215,1890)
M1_ENC_A: J4.3 U2.11 | length 1239.1
  Top Layer w15: U2.11 2012.24,1822.76 2036.7,1798.3 2088.3,1798.3 v1(2095,1805)
  Bottom Layer w15: J4.3 1295,2045 1422.5,1917.5 1847.5,1917.5 1960,1805 v1(2095,1805)
M1_ENC_B: J4.4 U2.9 | length 850.7
  Top Layer w15: v1(1840,1825) 1845.27,1819.73 1871.9,1819.73 1929.51,1762.12 1955.89,1762.12 U2.9
  Bottom Layer w15: J4.4 1290,1995 1390.5,1894.5 1770.5,1894.5 v1(1840,1825)
M1_PWM_1: U2.5 U5.3 | length 1494.2
  Top Layer w15: U2.5 1808.11,1699.39 1808.11,1661.81 1934.92,1535 v1(2300,1535) ; v1(2435,2095) 2442.18,2095 2472.18,2125 U5.3
  Bottom Layer w15: v1(2300,1535) 2300,1690 2435,1825 v1(2435,2095)
M1_PWM_1B: U1_MOTOR_DRIVE_1.9 U5.14 | length 2105.3
  Top Layer w10: U5.14 3075,2125 v1(3120,2170) ; v1(3260,3340) 3260,3465 3310,3515 3508.43,3515 3583.43,3440 3618.98,3440 3649.76,3409.21 3649.76,3395.2 U1_MOTOR_DRIVE_1.9
  Bottom Layer w10: v1(3120,2170) 3120,2380 3150,2410 3150,2766.3 3090,2826.3 3090,3170 v1(3260,3340)
M1_PWM_2: U2.6 U5.4 | length 1317.5
  Top Layer w15: U2.6 1839.6,1699.39 1839.6,1665.67 1925.27,1580 v1(2215,1580) ; v1(2385,2030) 2475,2030 2520,2075 U5.4
  Bottom Layer w15: v1(2215,1580) 2215,1665 2385,1835 v1(2385,2030)
M1_PWM_2B: U1_MOTOR_DRIVE_1.10 U5.13 | length 2067.1
  Top Layer w10: U5.13@2910,2075 3140,2075 3200,2135 3200,2995 v1(3260,3055) ; v1(3310,3430) 3310,3470 3330,3490 3505,3490 3593.07,3401.93 3630.08,3401.93 3630.16,3401.85 U1_MOTOR_DRIVE_1.10
  Bottom Layer w10: v1(3260,3055) 3260,3056.88 3310,3106.88 v1(3310,3430)
M2_ENC_A: J5.3 U2.29 | length 860.2
  Top Layer w15: v1(1405,1815) 1405,1815.72 1443.53,1854.25 U2.29
  Bottom Layer w15: J5.3 1050,1759.02 1050,1890 1090,1930 1210,1930 1325,1815 v1(1405,1815)
M2_ENC_B: J5.4 U2.30 | length 670.1
  Top Layer w15: v1(1365,1760) 1450,1760 1512.76,1822.76 U2.30
  Bottom Layer w15: J5.4 1155,1704.02 1155,1786.21 1167.9,1799.11 1265.89,1799.11 1310,1755 1360,1755 v1(1365,1760)
M2_PWM_1: U2.19 U5.5 | length 1110.2
  Top Layer w15: U2.19 1837.24,2155.58 1870,2188.34 v1(1870,2190) ; v1(2290,2030) 2332.5,1987.5 2492.5,1987.5 2530,2025 U5.5
  Bottom Layer w15: v1(1870,2190) 2130,2190 v1(2290,2030)
M2_PWM_1B: U1_MOTOR_DRIVE_2.9 U5.12 | length 1313
  Top Layer w10: U5.12 3165,2025 3218,2078 3218,2583 3286.2,2651.2 3420.92,2651.2 3532.19,2539.93 3586.88,2539.93 3595.99,2530.82 3595.99,2526.58 3597.6,2524.97 3597.6,2515.2 U1_MOTOR_DRIVE_2.9
M2_PWM_2: U2.20 U5.6 | length 1303.2
  Top Layer w15: U2.20 1805.75,2221.28 1820,2235.53 v1(1820,2245) ; v1(2290,1950) 2515,1950 2543.83,1978.83 2606.28,1978.83 2610.1,1975 U5.6
  Bottom Layer w15: v1(1820,2245) 1820,2143.79 1828.79,2135 2095,2135 2266.41,1963.59 2266.94,1963.59 2280.53,1950 v1(2290,1950)
M2_PWM_2B: U1_MOTOR_DRIVE_2.10 U5.11 | length 1279.2
  Top Layer w10: U5.11@2915,1975 3170,1975 3236,2041 3236,2556 3300,2620 3420,2620 3518.07,2521.93 3577.91,2521.93 3577.99,2521.85 U1_MOTOR_DRIVE_2.10
M3_ENC_A: J6.3 U2.25 | length 986.7
  Top Layer w15: J6.3 1160.77,1415.77 1160.77,1432.12 1303.68,1575.03 1303.68,1783.68 v1(1480,1960) ; v1(1580,2055) 1621.75,2013.25 U2.25
  Bottom Layer w15: v1(1480,1960) 1482.5,1960 1577.5,2055 v1(1580,2055)
M3_ENC_B: J6.4 U2.31 | length 695.2
  Top Layer w15: J6.4 1338.71,1443.71 1338.71,1578.71 1551.26,1791.26 U2.31
M3_PWM_1: U2.7 U6.3 | length 903.4
  Top Layer w15: U2.7 1871.1,1704.11 1871.1,1729.73 1884.37,1743 1916.1,1743 1922.34,1736.76 1923.24,1736.76 1975,1685 U6.3
M3_PWM_1B: U1_MOTOR_DRIVE_3.9 U6.14 | length 907.8
  Top Layer w10: U6.14 3180.28,1685 3330.28,1835 3525,1835 3615.07,1744.93 3684.05,1744.93 3694.76,1734.21 3694.76,1720.2 U1_MOTOR_DRIVE_3.9
M3_PWM_2: U2.8 U6.4 | length 843.4
  Top Layer w15: U2.8 1925.72,1701.75 1992.47,1635 U6.4
M3_PWM_2B: U1_MOTOR_DRIVE_3.10 U6.13 | length 877
  Top Layer w10: U6.13 3195,1635 3370,1810 3515,1810 3598.07,1726.93 U1_MOTOR_DRIVE_3.10@3675.08,1726.93
M_OUT_+_MOTOR_DRIVE_1: P3.1 U1_MOTOR_DRIVE_1.5 | length 84.9
  Top Layer w20: P3.1@4185,3120 P3.1
M_OUT_+_MOTOR_DRIVE_2: P5.1 U1_MOTOR_DRIVE_2.5 | length 0.2
  Top Layer w20: U1_MOTOR_DRIVE_2.5 U1_MOTOR_DRIVE_2.5@3667.72,2423.92
M_OUT_+_MOTOR_DRIVE_3: P7.1 U1_MOTOR_DRIVE_3.5 | length 21.2
  Top Layer w20: P7.1@4230,1470 P7.1
M_OUT_-_MOTOR_DRIVE_1: P4.1 U1_MOTOR_DRIVE_1.7 | length 56.6
  Top Layer w20: P4.1@4205,3490 P4.1
M_OUT_-_MOTOR_DRIVE_2: P6.1 U1_MOTOR_DRIVE_2.7 | length 63.6
  Top Layer w20: P6.1@4200,2635 P6.1
M_OUT_-_MOTOR_DRIVE_3: P8.1 U1_MOTOR_DRIVE_3.7
NetC21_2: C21.2 U8.3 | length 94.4
  Top Layer w20: C21.2@1120,3350.59 U8.3@1208.11,3350.59
  Top Layer w30: C21.2 1116.97,3347.56 C21.2@1120,3350.59
NetC23_1: C23.1 U8.4 | length 78
  Top Layer w20: U8.4@1226.81,3300.59 1228.62,3298.78 1228.62,3228.94 C23.1
NetC24_1: C24.1 R5.2 R6.1 U8.2 | length 210.4
  Top Layer w20: R6.1 R5.2 1051.22,3401.22 1113.78,3401.22 C24.1 1115.93,3401.52 1207.18,3401.52 U8.2@1208.11,3400.59
NetC25_1: C25.1 L1.1 U8.6 | length 205.5
  Top Layer w20: C25.1@1498.03,3342.44 C25.1
  Top Layer w25: U8.6 1431.99,3349.31 1491.16,3349.31 C25.1@1498.03,3342.44 ; C25.1 1501.97,3342.44 1558.44,3285.96 1580.61,3285.96 L1.1@1601.57,3265
NetC25_2: C25.2 U8.7 | length 80.5
  Top Layer w20: U8.7@1420.71,3400.59 1422.22,3399.07 1498.48,3399.07 C25.2
NetD1_2: D1.2 R1.2 | length 227.1
  Top Layer w15: R1.2 1851.73,2495.47 1887.2,2460 D1.2
NetD2_2: D2.2 R2.2 | length 47.9
  Top Layer w20: R2.2 D2.2
NetD3_1: D3.1 U2.2 | length 173.4
  Top Layer w15: D3.1 1672.56,1555.67 1680.81,1563.92 1698.92,1563.92 1711.26,1576.26 U2.2
NetD3_2: D3.2 R3.2 | length 60
  Top Layer w15: R3.2 D3.2@1620,1555
NetD4_MOTOR_DRIVE_1_1: D4_MOTOR_DRIVE_1.1 R15_MOTOR_DRIVE_1.1 | length 174.2
  Top Layer w15: R15_MOTOR_DRIVE_1.1 3750,2945 3796.46,2898.54 D4_MOTOR_DRIVE_1.1
NetD4_MOTOR_DRIVE_1_2: D4_MOTOR_DRIVE_1.2 U1_MOTOR_DRIVE_1.1 | length 668.7
  Top Layer w10: U1_MOTOR_DRIVE_1.1 3630.16,3278.15 3630.08,3278.07 3583.07,3278.07 3535,3230 3535,3080 3620,2995 3620,2850 3645,2825 D4_MOTOR_DRIVE_1.2
NetD4_MOTOR_DRIVE_2_1: D4_MOTOR_DRIVE_2.1 R15_MOTOR_DRIVE_2.1 | length 97.5
  Top Layer w15: D4_MOTOR_DRIVE_2.1 3706.28,2078.72 3706.28,2161.75 R15_MOTOR_DRIVE_2.1 R15_MOTOR_DRIVE_2.1@3713.94,2165.47
NetD4_MOTOR_DRIVE_2_2: D4_MOTOR_DRIVE_2.2 U1_MOTOR_DRIVE_2.1 | length 419.4
  Top Layer w10: U1_MOTOR_DRIVE_2.1 3577.99,2398.15 3577.91,2398.07 3553.07,2398.07 3515,2360 3515,2210 D4_MOTOR_DRIVE_2.2@3645,2080
NetD4_MOTOR_DRIVE_3_1: D4_MOTOR_DRIVE_3.1 R15_MOTOR_DRIVE_3.1 | length 98.4
  Top Layer w10: R15_MOTOR_DRIVE_3.1 R15_MOTOR_DRIVE_3.1@3693.94,1365.47
  Top Layer w15: R15_MOTOR_DRIVE_3.1 3690,1345 3720,1315 3720,1288.66 D4_MOTOR_DRIVE_3.1
NetD4_MOTOR_DRIVE_3_2: D4_MOTOR_DRIVE_3.2 U1_MOTOR_DRIVE_3.1 | length 434.1
  Top Layer w10: D4_MOTOR_DRIVE_3.2@3670,1285 3670,1285.51 3657.8,1297.72 3657.28,1297.72 3585,1370 3585,1575 3613.07,1603.07 3675.08,1603.07 3675.16,1603.15 U1_MOTOR_DRIVE_3.1
NetP1_1: P1.1 Q1.5 | length 383.6
  Top Layer w70: Q1.5 2465,3415 2785,3415 P1.1@2805,3435
NetR1_1: R1.1 U3.4 | length 104.1
  Top Layer w15: U3.4 1778.8,2656.44 1778.8,2555.73 R1.1
NetR4_1: R4.1 U8.1 | length 185
  Top Layer w20: U8.1@1208.11,3450.59 1220.3,3450.59 1222.11,3452.4 1222.11,3546.63 1240.47,3565 R4.1
NetR10_MOTOR_DRIVE_1_1: R10_MOTOR_DRIVE_1.1 U1_MOTOR_DRIVE_1.12 | length 155.6
  Top Layer w10: R10_MOTOR_DRIVE_1.1 3519.7,3380 3549.7,3350 3599.56,3350 3599.64,3349.92 U1_MOTOR_DRIVE_1.12@3602.68,3349.92
NetR10_MOTOR_DRIVE_2_1: R10_MOTOR_DRIVE_2.1 U1_MOTOR_DRIVE_2.12 | length 172.2
  Top Layer w10: R10_MOTOR_DRIVE_2.1 3450,2495 3475.16,2469.84 U1_MOTOR_DRIVE_2.12
  Top Layer w15: R10_MOTOR_DRIVE_2.1@3399.53,2491.06 R10_MOTOR_DRIVE_2.1
NetR10_MOTOR_DRIVE_3_1: R10_MOTOR_DRIVE_3.1 U1_MOTOR_DRIVE_3.12 | length 174.9
  Top Layer w10: R10_MOTOR_DRIVE_3.1 3530,1700 3555.16,1674.84 U1_MOTOR_DRIVE_3.12
NetR11_MOTOR_DRIVE_1_1: R11_MOTOR_DRIVE_1.1 U1_MOTOR_DRIVE_1.11 | length 181.2
  Top Layer w10: R11_MOTOR_DRIVE_1.1 3505,3445 3580.47,3369.53 U1_MOTOR_DRIVE_1.11
NetR11_MOTOR_DRIVE_2_1: R11_MOTOR_DRIVE_2.1 U1_MOTOR_DRIVE_2.11 | length 192.5
  Top Layer w10: R11_MOTOR_DRIVE_2.1 3435,2570 3515.47,2489.53 U1_MOTOR_DRIVE_2.11
  Top Layer w15: R11_MOTOR_DRIVE_2.1 R11_MOTOR_DRIVE_2.1@3400.47,2569.05
NetR11_MOTOR_DRIVE_3_1: R11_MOTOR_DRIVE_3.1 U1_MOTOR_DRIVE_3.11 | length 195.7
  Top Layer w10: R11_MOTOR_DRIVE_3.1 3515,1770 3590.47,1694.53 U1_MOTOR_DRIVE_3.11
NetR12_MOTOR_DRIVE_1_1: R12_MOTOR_DRIVE_1.1 U1_MOTOR_DRIVE_1.14 | length 177.1
  Top Layer w10: R12_MOTOR_DRIVE_1.1 3510,3245 3575.47,3310.47 U1_MOTOR_DRIVE_1.14
NetR12_MOTOR_DRIVE_2_1: R12_MOTOR_DRIVE_2.1 U1_MOTOR_DRIVE_2.14 | length 189.5
  Top Layer w10: R12_MOTOR_DRIVE_2.1 3450,2355 3525.47,2430.47 U1_MOTOR_DRIVE_2.14
NetR12_MOTOR_DRIVE_3_1: R12_MOTOR_DRIVE_3.1 U1_MOTOR_DRIVE_3.14 | length 196.7
  Top Layer w10: R12_MOTOR_DRIVE_3.1 3515,1560 3590.47,1635.47 U1_MOTOR_DRIVE_3.14
NetR13_MOTOR_DRIVE_1_1: R13_MOTOR_DRIVE_1.1 U1_MOTOR_DRIVE_1.13 | length 158.3
  Top Layer w10: R13_MOTOR_DRIVE_1.1 3530,3310 3550.16,3330.16 U1_MOTOR_DRIVE_1.13
NetR13_MOTOR_DRIVE_2_1: R13_MOTOR_DRIVE_2.1 U1_MOTOR_DRIVE_2.13 | length 168.7
  Top Layer w10: R13_MOTOR_DRIVE_2.1 3450,2425 3475.16,2450.16 U1_MOTOR_DRIVE_2.13
NetR13_MOTOR_DRIVE_3_1: R13_MOTOR_DRIVE_3.1 U1_MOTOR_DRIVE_3.13 | length 174.9
  Top Layer w10: R13_MOTOR_DRIVE_3.1 3530,1630 3555.16,1655.16 U1_MOTOR_DRIVE_3.13
NetR14_MOTOR_DRIVE_1_1: R14_MOTOR_DRIVE_1.1 U1_MOTOR_DRIVE_1.2 | length 388.4
  Top Layer w10: U1_MOTOR_DRIVE_1.2 3649.84,3261.48 3640.66,3252.3 3590.16,3252.3 3554.72,3216.85 3554.72,3110.28 3625,3040 3669.06,3040 R14_MOTOR_DRIVE_1.1
NetR14_MOTOR_DRIVE_2_1: R14_MOTOR_DRIVE_2.1 U1_MOTOR_DRIVE_2.2 | length 111
  Top Layer w10: R14_MOTOR_DRIVE_2.1@3560,2309.53 3560,2350 3597.68,2387.68 U1_MOTOR_DRIVE_2.2
NetR14_MOTOR_DRIVE_3_1: R14_MOTOR_DRIVE_3.1 U1_MOTOR_DRIVE_3.2 | length 101
  Top Layer w10: R14_MOTOR_DRIVE_3.1 3629.21,1558.74 3657.72,1558.74 3694.76,1595.79 3694.76,1609.8 U1_MOTOR_DRIVE_3.2
NRST: C6.2 J2.10 U2.4 | length 1068.6
  Top Layer w15: v1(1335,1880) 1335,2040.5 1489.5,2195 J2.10 ; C6.2 1774.63,1610.37 1774.63,1701.38 U2.4 1774.63,1702.12 1774.63,1774.63 v1(1775,1775)
  Bottom Layer w15: v1(1335,1880) 1341.7,1873.3 1357.98,1873.3 1361.29,1870 1680,1870 v1(1775,1775)
NSLEEP: U2.26 U7.4 | length 1999.5
  Top Layer w15: v2(1510,2095) 1510,2034.87 1593.77,1951.1 1619.39,1951.1 U2.26 ; v2(2265,2130) 2305,2090 2345,2090 2465,2210 2465,2425 2560,2520 U7.4
  Bottom Layer w15: v2(1510,2095) 1511.62,2095 1536.62,2120 1585,2120 1640,2065 1670,2065 1705,2100 1705,2210 1795,2300 1850,2300 1870,2280 2080,2280 2230,2130 v2(2265,2130)
nSLEEP_MOTOR_DRIVE_1: U1_MOTOR_DRIVE_1.3 U1_MOTOR_DRIVE_2.3 U1_MOTOR_DRIVE_3.3 U7.13
SWCLK: J2.4 U2.24 | length 395
  Top Layer w15: J2.4 1537,2338 1581.8,2338 1679.76,2240.04 U2.24
SWDIO: J2.2 U2.23 | length 457.8
  Top Layer w15: J2.2 1537,2388 1581.25,2388 1711.26,2257.99 U2.23
TRW_PWM: U2.27 U6.5 | length 2077.3
  Top Layer w15: U2.27 1624.11,1919.6 1649.73,1919.6 1663,1932.88 1663,1997.9 1647.35,2013.55 1647.35,2085 1639.85,2092.5 1639.85,2135.15 v1(1635,2140) ; v1(2485,1585) U6.5
  Bottom Layer w15: v1(1635,2140) 1635,2180 1787.5,2332.5 2067.5,2332.5 2174.35,2225.65 2385.56,2225.65 2485,2126.21 v1(2485,1585)
TRW_PWM_B: J3.2 U6.12 | length 410.4
  Top Layer w20: U6.12 v1(3045,1585)
  Bottom Layer w20: J3.2 3020,1328.45 3045,1353.45 v1(3045,1585)
TRW_SERVO: U2.12 U7.3 | length 1485
  Top Layer w15: U2.12 2125.85,1854.25 2187.5,1792.6 2187.5,1792.4 2222.4,1757.5 2257.6,1757.5 2300,1799.9 v1(2300,1875) ; v1(2340,2165) 2340,2234.74 2425,2319.74 2425,2525 2470,2570 U7.3@2715,2570
  Bottom Layer w15: v1(2300,1875) 2340,1915 v1(2340,2165)
TRW_SERVO_B: J7.2 U7.14 | length 1384.1
  Top Layer w15: U7.14 2970.81,2570 3000.81,2540 v1(3005,2540)
  Bottom Layer w15: J7.2 2314.02,3275 2440,3275 2880,2835 2880,2665 v1(3005,2540)
USB_D+: J1.3 U1.3 U2.22 | length 991.5
  Top Layer w15: J1.3 1254.02,2589.02 1273.85,2569.19 1366.71,2569.19 1375.49,2560.4 1375.49,2539.31 U1.3 1539.76,2535 1742.76,2332.01 U2.22
USB_D-: J1.2 U1.4 U2.21 | length 1117.5
  Top Layer w15: J1.2 1265.39,2614.61 1285,2595 1371.02,2595 1379.8,2603.79 U1.4 1539.76,2637.36 1774.25,2402.87 U2.21
V_BATT: C7.2 C11_MOTOR_DRIVE_1.2 C11_MOTOR_DRIVE_2.2 C11_MOTOR_DRIVE_3.2 C12_MOTOR_DRIVE_1.P C12_MOTOR_DRIVE_2.P C12_MOTOR_DRIVE_3.P C13_MOTOR_DRIVE_1.2 C13_MOTOR_DRIVE_2.2 C13_MOTOR_DRIVE_3.2 C17.2 C26.2 C27.2 C28.2 Q1.1 Q1.2 Q1.3 R4.2 U1_MOTOR_DRIVE_1.4 U1_MOTOR_DRIVE_2.4 U1_MOTOR_DRIVE_3.4 U4.1 U4.3 U8.8 | length 8009
  Top Layer w15: C7.2 2827.56,2980 U4.1 2879.41,2938.79 2888.2,2930 2921.21,2930 2930.59,2939.38 U4.3
  Top Layer w19: U1_MOTOR_DRIVE_2.4@3640,2408.22 U1_MOTOR_DRIVE_2.4 ; v1@3668.78,3496.22 v1(3670,3495) 3692.17,3472.83 U1_MOTOR_DRIVE_1.4 3692.17,3220.55 3675,3203.39 v1(3675,3195) ; v1(3700,1815) 3737.17,1777.83 U1_MOTOR_DRIVE_3.4 3737.17,1517.17 v1(3720,1500)
  Top Layer w20: R4.2 1395.59,3565 1420.71,3539.88 U8.8@1420.71,3450.59 ; 2527.5,3165 2520,3157.5 2520,3065 2605,2980 C7.2@2827.56,2980 ; v1(3622.81,2627.19) 3622.81,2619.07 3640.36,2601.52 3640.36,2512.14 U1_MOTOR_DRIVE_2.4@3640.16,2511.94 ; v1(3630,2330) 3640.36,2340.36 3640.36,2407.86 U1_MOTOR_DRIVE_2.4@3640,2408.22
  Top Layer w25: U8.8@1420.71,3450.59 1481.38,3450.59
  Top Layer w30: C17.2 C26.2 C27.2 C28.2 1681.97,3452.44 1682.72,3451.69 1682.72,3449.72 1705,3427.44 1705,3210 1750,3165 2365,3165 Q1.1 ; 2415,3165 Q1.2 ; 2465,3165 Q1.3
  Top Layer w70: 2365,3165 2415,3165 2465,3165 2527.5,3165 2590,3165 2705,3280 3193.43,3280 C12_MOTOR_DRIVE_1.P@3483.43,2990
  Bottom Layer w70: C12_MOTOR_DRIVE_3.P@3488.43,1365 3488.43,1665 ; C12_MOTOR_DRIVE_3.P 3670,1365 3720,1415 v1(3720,1500) ; v1(3620,2465) 3485,2465 ; v1(3622.81,2627.19) 3595,2655 3485,2655 ; v1(3630,2330) 3610,2310 3485,2310 ; v1(3670,3495) 3675,3490 v1(3675,3195) 3675,3181.57 C12_MOTOR_DRIVE_1.P 3485,2991.57 3485,2655 ; v1(3700,1815) 3670,1785 3488.43,1785 ; v1(3715,1665) 3488.43,1665 ; 3485,2310 3485,2465 ; 3485,2310 3485,2166.57 C12_MOTOR_DRIVE_2.P 3483.43,1790 3488.43,1785 ; 3485,2465 3485,2655 ; 3488.43,1665 3488.43,1785
  other v1: 3670,3340
pads on no net: J1. J1.4 J2.6 J2.7 J2.8 J3. J3.3 J3.4 J4. J5. J6. J7. J8. J9. U1.1 U2.3 U3.1@1881.93,2760 U4.4 U5.7 U5.10 U6.7 U6.10 U7.5 U7.6 U7.7 U7.10 U7.11 U7.12 U8.10 U8.11 U8.12 U8.13 U8.14 U8.15 U8.16 U8.17

## Polygon pours and split planes (outlines as drawn)
GNDB on Top Layer "NONET_L01_P034" (solid, pour order 34): 1270,3180 1150,3180 1140,3170 1140,3055 1155,3040 1445,3040 1470,3065 1470,3305 1360,3305 1270,3285
GNDB on Top Layer "GNDB_L01_P035" (solid, pour order 35): 1275,3465 1250,3490 1250,3525 1400,3525 1400,3485 1380,3465
M_OUT_+_MOTOR_DRIVE_1 on Top Layer "M_OUT_+_MOTOR_DRIVE_1_L01_P027" (solid, pour order 27): 3710,3275 3710,3195 3825,3080 4140,3080 4175,3115 4175,3185 4120,3185 4110,3175 3810,3175 3730,3255 3730,3275
M_OUT_+_MOTOR_DRIVE_3 on Top Layer "M_OUT_+_MOTOR_DRIVE_3_L01_P019" (solid, pour order 19): 3755,1605 3775,1605 3775,1565 3830,1510 4165,1510 4165,1430 4125,1470 3820,1470 3750,1540 3750,1585 3755,1590 3755,1605 3770,1605 3775,1600
GNDB on Top Layer "GNDB_L01_P004" (solid, pour order 4): 3740,3415 3775,3450 3995,3450 4030,3415 4095,3415 4095,3190 3825,3190 3740,3275
GNDB on Top Layer "GNDB_L01_P005" (solid, pour order 5): 3689.42,2539.42 3735,2585 4105,2585 4105,2370 3715,2370 3689.42,2395.58
GNDB on Top Layer "GNDB_L01_P006" (solid, pour order 6): 3785,1765 3820,1800 4065,1800 4065,1520 3835,1520 3785,1570 3785,1735
M_OUT_-_MOTOR_DRIVE_3 on Top Layer "M_OUT_-_MOTOR_DRIVE_3_L01_P018" (solid, pour order 18): 3775,1775 3810,1810 4260,1810 4195,1880 3800,1880 3755,1835 3755,1730 3770,1730 3775,1730 3770,1730 3775,1735
M_OUT_+_MOTOR_DRIVE_2 on Top Layer "M_OUT_+_MOTOR_DRIVE_2_L01_P020" (solid, pour order 20): 3675,2385 3705,2355 4180,2355 4180,2285 3745,2285 3720,2285 3660,2345 3660,2405 3670,2405 3675,2400
M_OUT_-_MOTOR_DRIVE_2 on Top Layer "M_OUT_-_MOTOR_DRIVE_2_L01_P023" (solid, pour order 23): 3675,2525 3675,2550 3720,2595 4170,2595 4170,2655 3715,2655 3660,2600 3660,2525
M_OUT_-_MOTOR_DRIVE_1 on Top Layer "M_OUT_-_MOTOR_DRIVE_1_L01_P024" (solid, pour order 24): 3725,3405 3725,3430 3765,3470 4185,3470 4185,3515 4165,3535 3740,3535 3710,3505 3710,3410 3715,3405
GND on GND top "GND_L02_P008" (solid, pour order 8): 1000,1135 2775,1135 2775,2690 2520,2945 1000,2945
GNDB on GND top "GNDB_L02_P010" (solid, pour order 10): 1000,3015 1000,3640 4395,3640 4395,1135 2845,1135 2845,2705 2535,3015
GND on GND bottom "GND_L03_P009" (solid, pour order 9): 1004.65,1135 2775,1135 2775,2690 2520,2945 1000,2945
GNDB on GND bottom "GNDB_L03_P011" (solid, pour order 11): 1000,3015 1000,3640 4395,3640 4395,1135 2845,1135 2845,2705 2535,3015
GNDB on Bottom Layer "GNDB_L04_P044" (solid, pour order 44): 3990,1800 4030,1840 4185,1840 4215,1810 4215,1520 4175,1480 4170,1485 4000,1485 3990,1495
GNDB on Bottom Layer "GNDB_L04_P042" (solid, pour order 42): 3800,1795 3825,1820 3930,1820 3945,1805 3945,1535 3910,1500 3820,1500 3800,1520
GNDB on Bottom Layer "GNDB_L04_P039" (solid, pour order 39): 3700,2550 3745,2595 3825,2595 3855,2565 3855,2385 3790,2320 3750,2320 3700,2370
GNDB on Bottom Layer "GNDB_L04_P038" (solid, pour order 38): 3755,3435 3800,3480 4110,3480 4140,3450 4140,3170 4110,3140 3800,3140 3755,3185
GNDB on Bottom Layer "GNDB_L04_P040" (solid, pour order 40): 3930,2595 3970,2635 4125,2635 4200,2560 4200,2370 4130,2300 3970,2300 3930,2340

## Silkscreen, mask and mechanical layers (free items; w line width, h text height)
Top Overlay:
  lines w10: 1005,2945 2520,2945 2775,2690 2775,1135 ; 1005,3015 2535,3015 2845,2705 2845,1135
Mechanical 1:
  lines w20: 1000,1135 1000,3245 1000,3640 4395,3640 4395,1135 4150,1135 1000,1135

## Text inside footprints (layer, text, board x,y; h text height)
J1: Mechanical 13 "PCB END" at 1007.36,2402.01 h16 r270
J2: Mechanical 1 "J1" at 1432.5,2312.14 h25 r270
U2: Top Overlay "*" at 1674.02,1637.5 h50 r90; Mechanical 13 "*" at 1689.02,1731 h50 r90